# EAGLE board 2014_10_27_panel (EAGLE 6.5.0), part 1 of 2
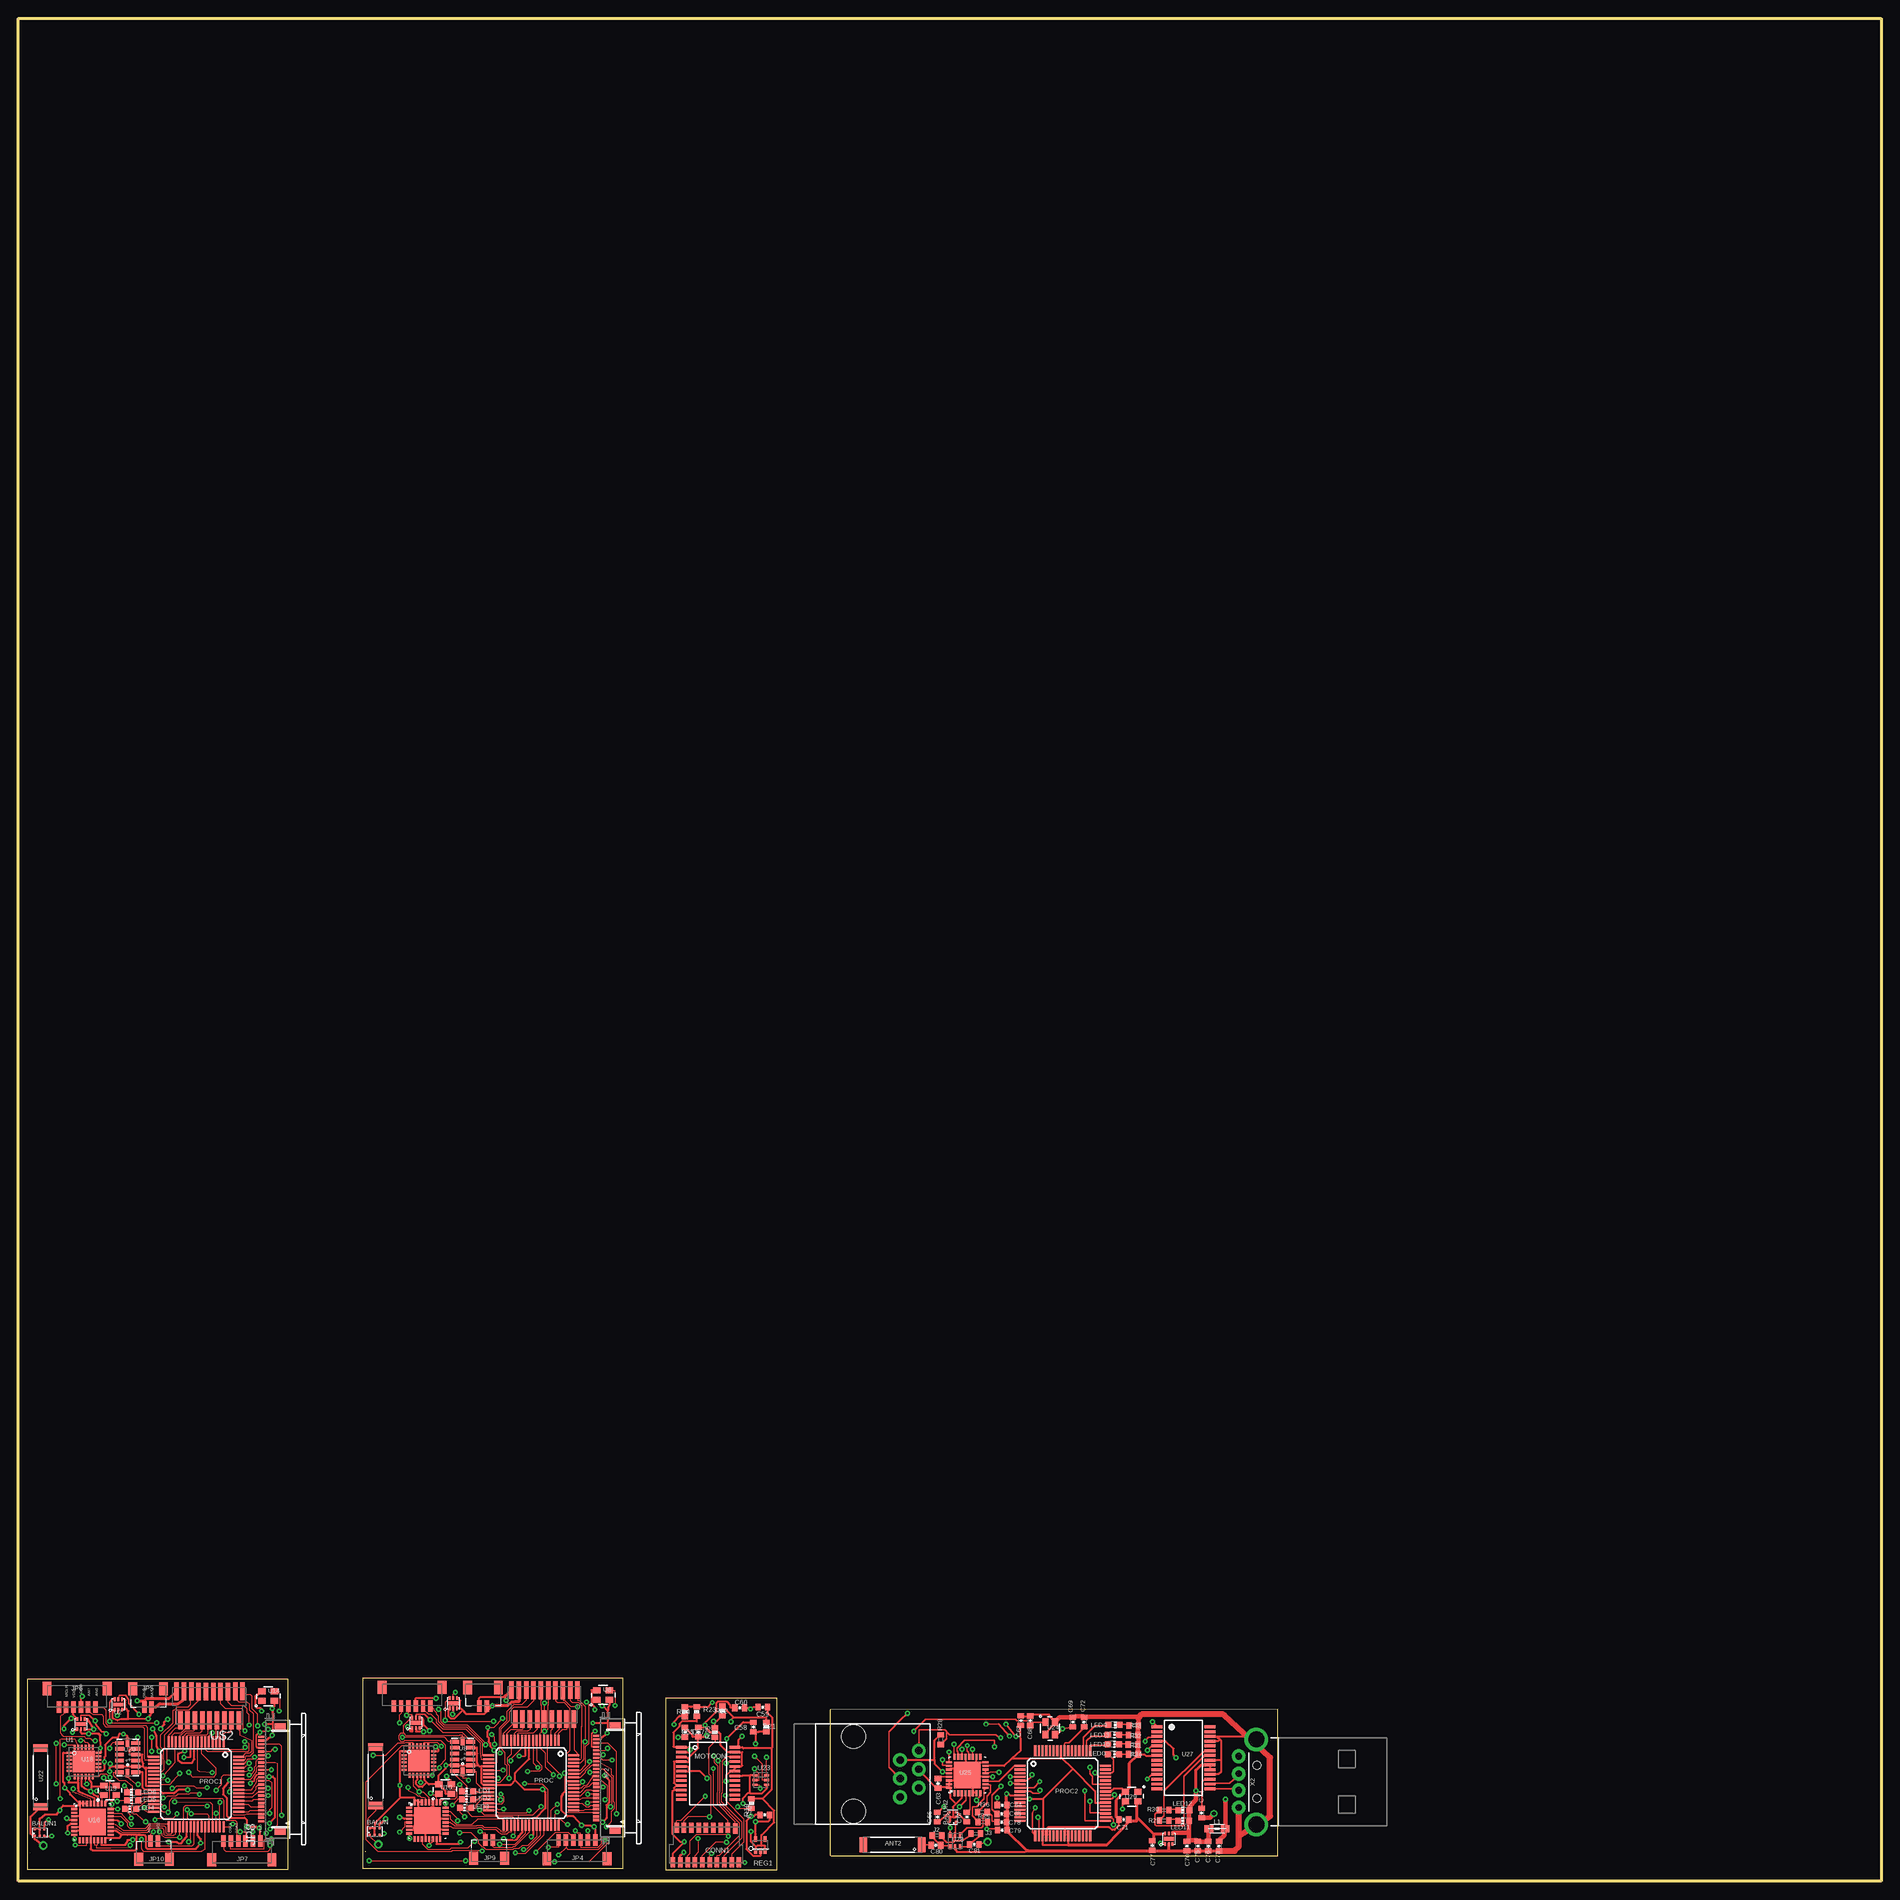
[diagram p0: board, top side]
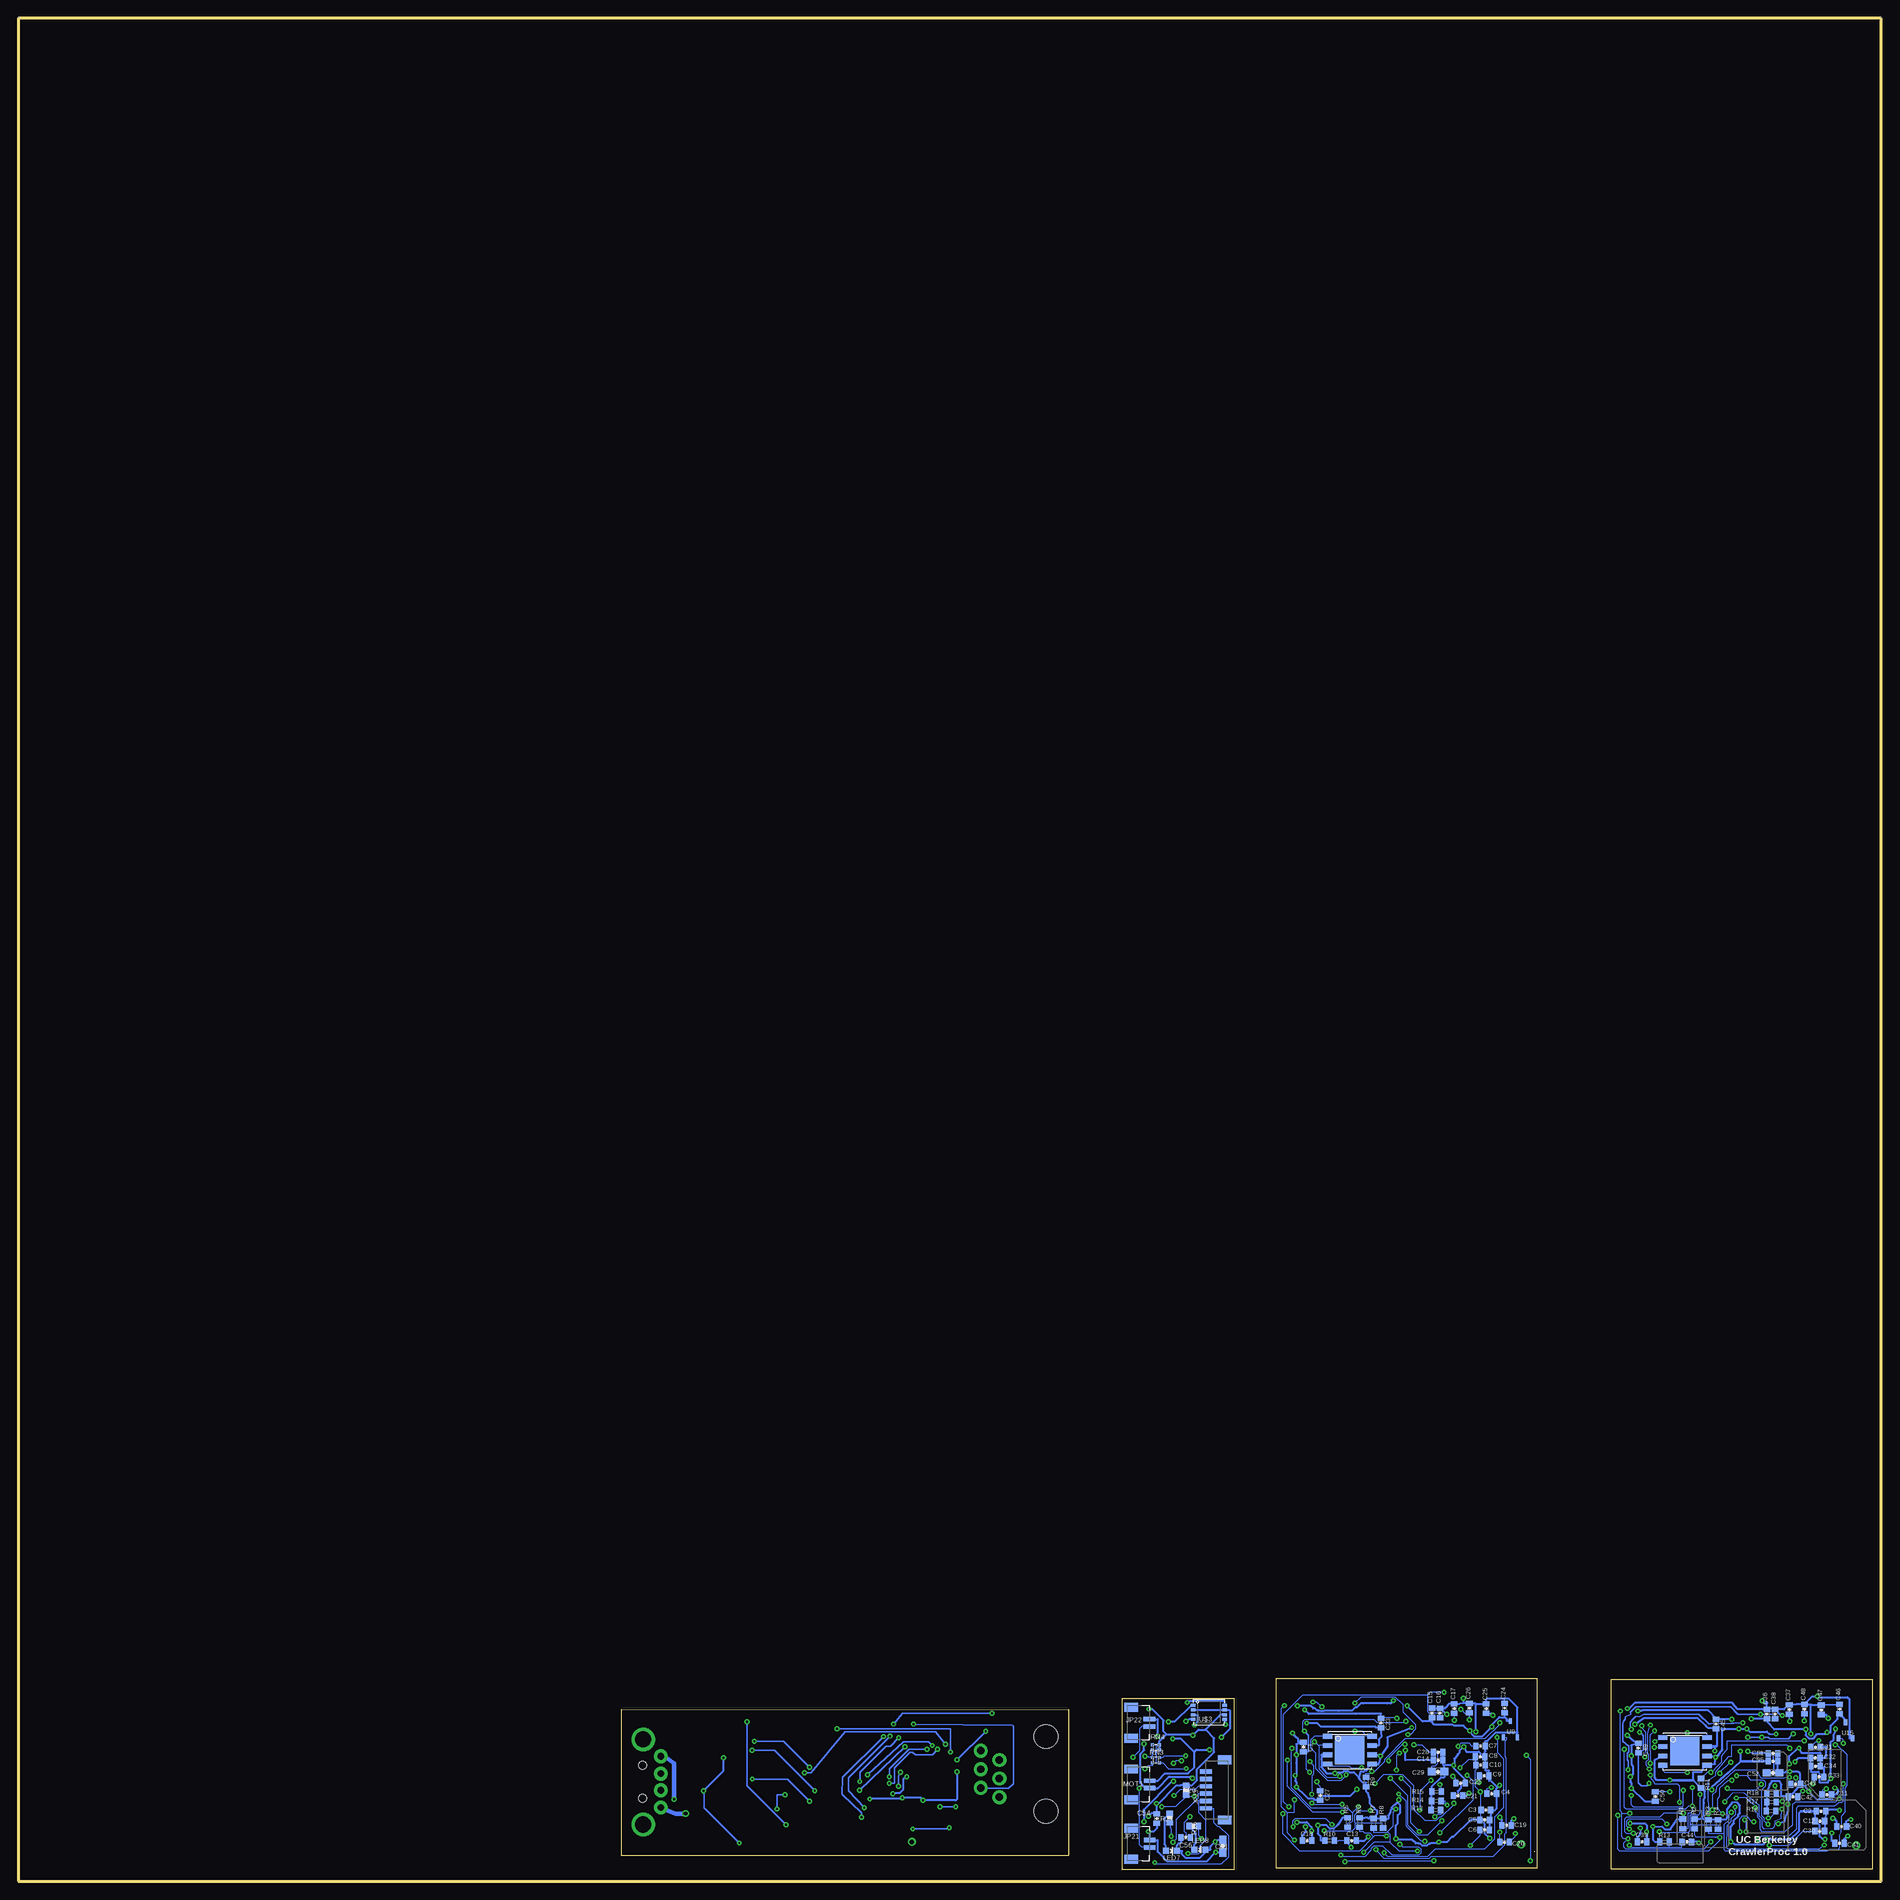
[diagram p1: board, bottom side, seen from below]

Size 254 x 254 mm. Coordinates in mm from the lower left corner, seen from the top.
Outline: 46.97,1.74 82.47,1.75 82.47,27.65 46.92,27.65 46.92,1.75
Outline: 47.28,4.05 47.27,4.05 47.27,4.04
Outline: 1.6,3.89 1.59,3.89 1.59,3.88
Outline: 110.81,3.47 171.76,3.43 171.76,23.43 110.77,23.4
Outline: 121.77,3.43 121.76,3.43
Outline: 110.76,3.43 110.76,23.43
Outline: 0,0 0,254 254,254 254,0 0,0
Outline: 1.24,1.59 36.79,1.59 36.79,27.49 1.24,27.49 1.24,1.59
Outline: 88.27,1.54 103.42,1.54 103.42,24.94 88.27,24.94 88.27,1.54
Copper layers (1*16): Top 0.035mm / dielectric 1.5mm / Bottom 0.035mm
Design rules "default *": minimum track width 5mil, minimum drill 10mil, track to track 5mil, track to pad 5mil, pad to pad 5mil, via to via 5mil, smd to smd 5mil, copper to edge 5mil, drill to drill 5mil, minimum pad ring 10mil, minimum via ring 8mil, stop-mask expansion 4mil, vias tented up to drill 27mil, thermal gap 10mil
Net classes: 1 sup: width 0.254 mm; 2 GND: width 0.305 mm, drill 0.254 mm, clearance 0.152 mm; 3 VCC: width 0.254 mm, drill 0.254 mm, clearance 0.152 mm

## Footprints (pad centres in the part's own frame; a part is rotated, then mirrored left to right if it is on the bottom)
ANTENNA_PAD = drill 0.6: P$1 0,0
ANTENNA-CHIP = smd 1 x 2: NC 4,0; SIG -4,0
BALUN = smd 0.27 x 0.4: 1 -0.7,-0.5; 2 -0.05,-0.5; 3 0.6,-0.5; 4 0.6,0.5; 5 -0.05,0.5; 6 -0.7,0.5
0402-CAP = smd 0.7 x 0.9: 1 -0.65,0; 2 0.65,0
0603-CAP = smd 1.1 x 1: 1 -0.85,0; 2 0.85,0
SAMTEC_19P_1MM_SOCKET = smd 0.61 x 1.375: 1 -4,-2.362; 2 -3.5,2.362; 3 -3,-2.362; 4 -2.5,2.362; 5 -2,-2.362; 6 -1.5,2.362; 7 -1,-2.362; 8 -0.5,2.362; 9 0,-2.362; 10 0.5,2.362; 11 1,-2.362; 12 1.5,2.362; 13 2,-2.362; 14 2.5,2.362; 15 3,-2.362; 16 3.5,2.362; 17 4,-2.362; 18 4.5,2.25; 19 5,-2.362
RJ11-6 = drill 1.016 pad 1.88: 1 1.905,8.89; 2 3.175,6.35; 3 4.445,8.89; 4 5.715,6.35; 5 6.985,8.89; 6 8.255,6.35 | hole 3.251: 0,0; 10.16,0
R0402 = smd 0.7 x 0.9: 1 -0.65,0; 2 0.65,0
MOLEX-PICO_CLASP_S2P = smd 0.6 x 1.6: 1 -0.5,1; 2 0.5,1 | smd 1.2 x 1.8: A -2.1,-1.5; B 2.1,-1.5
MOLEX-52740-2490 = smd 0.3 x 0.8: 1 -5.75,2.5; 2 -5.25,2.5; 3 -4.75,2.5; 4 -4.25,2.5; 5 -3.75,2.5; 6 -3.25,2.5; 7 -2.75,2.5; 8 -2.25,2.5; 9 -1.75,2.5; 10 -1.25,2.5; 11 -0.75,2.5; 12 -0.25,2.5; 13 0.25,2.5; 14 0.75,2.5; 15 1.25,2.5; 16 1.75,2.5; 17 2.25,2.5; 18 2.75,2.5; 19 3.25,2.5; 20 3.75,2.5; 21 4.25,2.5; 22 4.75,2.5; 23 5.25,2.5; 24 5.75,2.5 | smd 0.85 x 1.5: P$1 -7.18,-0.1; P$2 7.18,-0.1
MOLEX-PICO_CLASP_S6P = smd 0.6 x 1.6: 1 -2.5,1; 2 -1.5,1; 3 -0.5,1; 4 0.5,1; 5 1.5,1; 6 2.5,1 | smd 1.2 x 1.8: A -4.1,-1.55; B 4.1,-1.55
0805 = smd 1.2 x 1: 1 -1.1,0; 2 1.1,0
CHIP-LED0603 = smd 0.8 x 0.8: A 0,-0.75; C 0,0.75
LED-0603 = smd 0.8 x 0.8: A 0,-0.75; C 0,0.75
SSOP24 = smd 0.348 x 1.397: 1 -3.575,-3.656; 2 -2.925,-3.656; 3 -2.275,-3.656; 4 -1.625,-3.656; 5 -0.975,-3.656; 6 -0.325,-3.656; 7 0.325,-3.656; 8 0.975,-3.656; 9 1.625,-3.656; 10 2.275,-3.656; 11 2.925,-3.656; 12 3.575,-3.656; 13 3.575,3.656; 14 2.925,3.656; 15 2.275,3.656; 16 1.625,3.656; 17 0.975,3.656; 18 0.325,3.656; 19 -0.325,3.656; 20 -0.975,3.656; 21 -1.625,3.656; 22 -2.275,3.656; 23 -2.925,3.656; 24 -3.575,3.656
TQFP64 = smd 1.5 x 0.28: 1 -5.8,3.75; 2 -5.8,3.25; 3 -5.8,2.75; 4 -5.8,2.25; 5 -5.8,1.75; 6 -5.8,1.25; 7 -5.8,0.75; 8 -5.8,0.25; 9 -5.8,-0.25; 10 -5.8,-0.75; 11 -5.8,-1.25; 12 -5.8,-1.75; 13 -5.8,-2.25; 14 -5.8,-2.75; 15 -5.8,-3.25; 16 -5.8,-3.75; 33 5.8,-3.75; 34 5.8,-3.25; 35 5.8,-2.75; 36 5.8,-2.25; 37 5.8,-1.75; 38 5.8,-1.25; 39 5.8,-0.75; 40 5.8,-0.25; 41 5.8,0.25; 42 5.8,0.75; 43 5.8,1.25; 44 5.8,1.75; 45 5.8,2.25; 46 5.8,2.75; 47 5.8,3.25; 48 5.8,3.75 | smd 0.28 x 1.5: 17 -3.75,-5.8; 18 -3.25,-5.8; 19 -2.75,-5.8; 20 -2.25,-5.8; 21 -1.75,-5.8; 22 -1.25,-5.8; 23 -0.75,-5.8; 24 -0.25,-5.8; 25 0.25,-5.8; 26 0.75,-5.8; 27 1.25,-5.8; 28 1.75,-5.8; 29 2.25,-5.8; 30 2.75,-5.8; 31 3.25,-5.8; 32 3.75,-5.8; 49 3.75,5.8; 50 3.25,5.8; 51 2.75,5.8; 52 2.25,5.8; 53 1.75,5.8; 54 1.25,5.8; 55 0.75,5.8; 56 0.25,5.8; 57 -0.25,5.8; 58 -0.75,5.8; 59 -1.25,5.8; 60 -1.75,5.8; 61 -2.25,5.8; 62 -2.75,5.8; 63 -3.25,5.8; 64 -3.75,5.8
0402-RES = smd 0.7 x 0.9: 1 -0.65,0; 2 0.65,0
SC-70-5 = smd 0.4 x 0.75: 1 -0.65,-0.825; 2 0,-0.825; 3 0.65,-0.825; 4 0.65,0.825; 5 -0.65,0.825
EXB24V = smd 0.4 x 0.45: 1 -0.35,-0.475; 2 0.35,-0.475; 3 0.35,0.475; 4 -0.35,0.475
MLF-6 = smd 0.25 x 0.5: 1 -0.5,-0.7; 2 0,-0.7; 3 0.5,-0.7; 4 0.5,0.7; 5 0,0.7; 6 -0.5,0.7 | smd 1.4 x 0.5: P$1 0,0
QFN-24 = smd 0.7 x 0.275: 1 -2,1.25; 2 -2,0.75; 3 -2,0.25; 4 -2,-0.25; 5 -2,-0.75; 6 -2,-1.25; 13 2,-1.25; 14 2,-0.75; 15 2,-0.25; 16 2,0.25; 17 2,0.75; 18 2,1.25 | smd 0.275 x 0.7: 7 -1.25,-2; 8 -0.75,-2; 9 -0.25,-2; 10 0.25,-2; 11 0.75,-2; 12 1.25,-2; 19 1.25,2; 20 0.75,2; 21 0.25,2; 22 -0.25,2; 23 -0.75,2; 24 -1.25,2 | smd 2.95 x 2.95: 25 -0.01,0.03
QFN-32 = smd 0.8 x 0.3: 1 -2.5,1.75; 2 -2.5,1.25; 3 -2.5,0.75; 4 -2.5,0.25; 5 -2.5,-0.25; 6 -2.5,-0.75; 7 -2.5,-1.25; 8 -2.5,-1.75; 17 2.5,-1.75; 18 2.5,-1.25; 19 2.5,-0.75; 20 2.5,-0.25; 21 2.5,0.25; 22 2.5,0.75; 23 2.5,1.25; 24 2.5,1.75 | smd 0.3 x 0.8: 9 -1.75,-2.5; 10 -1.25,-2.5; 11 -0.75,-2.5; 12 -0.25,-2.5; 13 0.25,-2.5; 14 0.75,-2.5; 15 1.25,-2.5; 16 1.75,-2.5; 25 1.75,2.5; 26 1.25,2.5; 27 0.75,2.5; 28 0.25,2.5; 29 -0.25,2.5; 30 -0.75,2.5; 31 -1.25,2.5; 32 -1.75,2.5 | smd 3.6 x 3.6: P$1 0,0.001
MLF(VDFN)-8 = smd 1.27 x 0.635: 1 0,4.31; 2 0,3.04; 3 0,1.77; 4 0,0.5; 5 6.05,0.5; 6 6.05,1.77; 7 6.05,3.04; 8 6.05,4.31 | smd 4 x 3.9: P$1 2.991,2.44
OSCILLATOR-SMD = smd 1 x 0.8: 1 -0.85,-0.65; 2 0.85,-0.65; 3 0.85,0.65; 4 -0.85,0.65
LGA14 = smd 0.5 x 1.2: 1 2,1.1; 2 1.2,1.1; 3 0.4,1.1; 4 -0.4,1.1; 5 -1.2,1.1; 6 -2,1.1; 8 -2,-1.1; 9 -1.2,-1.1; 10 -0.4,-1.1; 11 0.4,-1.1; 12 1.2,-1.1; 13 2,-1.1 | smd 1.2 x 0.5: 7 -2.1,0; 14 2.1,0
SOT-23-3 = smd 0.45 x 0.8: 1 0.2,0.4; 2 1.15,2.6; 3 2.1,0.4
CRYSTAL-SMD = smd 1 x 0.8: 1 -0.85,-0.65; 2 0.85,-0.65; 3 0.85,0.65; 4 -0.85,0.65
SC-70-6 = smd 0.3 x 0.7: 1 -0.65,-0.8; 2 0,-0.8; 3 0.65,-0.8; 4 0.65,0.8; 5 0,0.8; 6 -0.65,0.8
SSOP28 = smd 0.4 x 1.5: 1 -4.225,-3.625; 2 -3.575,-3.625; 3 -2.925,-3.625; 4 -2.275,-3.625; 5 -1.625,-3.625; 6 -0.975,-3.625; 7 -0.325,-3.625; 8 0.325,-3.625; 9 0.975,-3.625; 10 1.625,-3.625; 11 2.275,-3.625; 12 2.925,-3.625; 13 3.575,-3.625; 14 4.225,-3.625; 15 4.225,3.625; 16 3.575,3.625; 17 2.925,3.625; 18 2.275,3.625; 19 1.625,3.625; 20 0.975,3.625; 21 0.325,3.625; 22 -0.325,3.625; 23 -0.975,3.625; 24 -1.625,3.625; 25 -2.275,3.625; 26 -2.925,3.625; 27 -3.575,3.625; 28 -4.225,3.625
SAMTEC_19P_1MM_MICRO_CONN = smd 0.61 x 2.44: 1 -4,-2; 2 -3.5,1.955; 3 -3,-2; 4 -2.5,1.955; 5 -2,-1.955; 6 -1.5,1.955; 7 -1,-1.955; 8 -0.5,1.955; 9 0,-1.955; 10 0.5,1.955; 11 1,-1.955; 12 1.5,1.955; 13 2,-1.955; 14 2.5,1.955; 15 3,-2; 16 3.5,1.955; 17 4,-2; 18 4.5,1.955; 19 5,-2
8-PIN_MSOP = smd 0.6 x 0.41: 1 -2.15,0.975; 2 -2.15,0.325; 3 -2.15,-0.325; 4 -2.15,-0.975; 5 2.15,-0.975; 6 2.15,-0.325; 7 2.15,0.325; 8 2.15,0.975
USB-A-H = drill 0.914 pad 1.88: D+ 2.4,1.127; D- 2.4,-1.127; GND 2.4,3.5; VBUS 2.4,-3.5 | drill 2.2: GND2 0,-5.8; GND3 0,5.8 | hole 1.1: -0.1,2.25; -0.1,-2.25

## Placement (x,y rotation side)
ANT1  ANTENNA  [ANTENNA_PAD]  132.17,5.35 0 top
ANT2  ANTENNA-CHIP  [ANTENNA-CHIP]  119.2,4.96 180 top
BALUN  HHM1710D1  [BALUN]  48.64,6.78 0 top
BALUN1  HHM1710D1  [BALUN]  2.96,6.62 0 top
BALUN2  HHM1710D1  [BALUN]  127.43,8.81 90 top
C1  0.1uF  [0402-CAP]  78.77,18.31 270 bottom
C2  1uF  [0402-CAP]  8.22,9.54 0 bottom
C3  1uF  [0402-CAP]  53.9,9.7 0 bottom
C4  1uF  [0402-CAP]  53.09,11.94 0 bottom
C5  1uF  [0402-CAP]  54.05,8.34 0 bottom
C6  1uF  [0402-CAP]  54.05,6.99 0 bottom
C7  2.2nF  [0402-CAP]  54.61,18.42 180 bottom
C8  0.1uF  [0402-CAP]  54.67,16.95 0 bottom
C9  0.1uF  [0402-CAP]  54.13,14.37 0 bottom
C10  10nF  [0402-CAP]  54.63,15.83 0 bottom
C11  1uF  [0402-CAP]  7.41,11.78 0 bottom
C12  1uF  [0402-CAP]  8.37,8.19 0 bottom
C13  0.1uF  [0402-CAP]  72.18,5.52 0 bottom
C14  0.1uF  [0402-CAP]  60.4,16.51 0 bottom
C15  1uF  [0402-CAP]  61.25,22.95 90 bottom
C16  1uF  [0402-CAP]  60.15,22.94 90 bottom
C17  1uF  [0402-CAP]  58.21,23.54 90 bottom
C18  0.1uF  [0402-CAP]  78.28,5.53 0 bottom
C19  22pF  [0402-CAP]  51.06,7.61 180 bottom
C20  22pF  [0402-CAP]  51.35,5.33 180 bottom
C21  12pF  [0402-CAP]  57.69,11.66 180 bottom
C22  12pF  [0402-CAP]  57.33,13.37 0 bottom
C23  0.1uF  [0402-CAP]  68.2,21.58 270 bottom
C24  1uF  [0402-CAP]  51.35,23.63 90 bottom
C25  1uF  [0402-CAP]  53.85,23.52 90 bottom
C26  1uF  [0402-CAP]  56.15,23.63 90 bottom
C27  2.2uF  [0402-CAP]  76.48,11.7 270 bottom
C28  0.1uF  [0402-CAP]  60.4,17.58 0 bottom
C29  10uF  [0603-CAP]  60.43,14.94 180 bottom
C30  1uF  [0402-CAP]  8.37,6.83 0 bottom
C31  2.2nF  [0402-CAP]  8.93,18.26 180 bottom
C32  0.1uF  [0402-CAP]  8.99,16.8 0 bottom
C33  0.1uF  [0402-CAP]  8.45,14.21 0 bottom
C34  10nF  [0402-CAP]  8.95,15.67 0 bottom
C35  0.1uF  [0402-CAP]  14.72,16.35 0 bottom
C36  1uF  [0402-CAP]  15.57,22.79 90 bottom
C37  1uF  [0402-CAP]  12.53,23.38 90 bottom
C38  1uF  [0402-CAP]  14.47,22.78 90 bottom
C39  0.1uF  [0402-CAP]  32.6,5.37 0 bottom
C40  22pF  [0402-CAP]  5.38,7.45 180 bottom
C41  22pF  [0402-CAP]  5.67,5.17 180 bottom
C42  12pF  [0402-CAP]  12.01,11.51 180 bottom
C43  12pF  [0402-CAP]  11.65,13.21 0 bottom
C44  0.1uF  [0402-CAP]  26.5,5.36 0 bottom
C45  0.1uF  [0402-CAP]  22.52,21.42 270 bottom
C46  1uF  [0402-CAP]  5.67,23.47 90 bottom
C47  1uF  [0402-CAP]  8.17,23.36 90 bottom
C48  1uF  [0402-CAP]  10.47,23.47 90 bottom
C49  0.1uF  [0402-CAP]  33.09,18.15 270 bottom
C50  2.2uF  [0402-CAP]  30.8,11.54 270 bottom
C51  0.1uF  [0402-CAP]  14.72,17.42 0 bottom
C52  10uF  [0603-CAP]  14.75,14.79 180 bottom
C53  1uF  [0402-CAP]  101.77,9.04 0 top
C54  2.2uF  [0402-CAP]  98.77,8.53 270 bottom
C55  0.01uF  [0402-CAP]  90.89,20.3 270 top
C56  1nF  [0402-CAP]  94.83,5.96 0 bottom
C57  0.1uF  [0402-CAP]  92.71,20.32 90 top
C58  0.1uF  [0402-CAP]  100.23,21.02 90 top
C59  0.1uF  [0402-CAP]  101.49,23.72 0 top
C60  0.1uF  [0402-CAP]  98.35,23.64 180 top
C61  10uF  [0603-CAP]  89.75,4.76 270 bottom
C62  1uF  [0402-CAP]  136.68,21.91 90 top
C63  1uF  [0402-CAP]  125.39,13.34 270 top
C64  1uF  [0402-CAP]  134.13,10.36 0 top
C65  1uF  [0402-CAP]  134.08,9.16 0 top
C66  22pF  [0402-CAP]  125.3,8.76 90 top
C67  22pF  [0402-CAP]  129.34,8.76 90 top
C68  12pF  [0402-CAP]  137.97,21.87 90 top
C69  12pF  [0402-CAP]  143.77,21.7 90 top
C70  1uF  [0402-CAP]  159.34,4.81 270 top
C71  1uF  [0402-CAP]  150.74,8.4 180 top
C72  2.2uF  [0402-CAP]  145.32,21.68 90 top
C73  10nF  [0402-CAP]  163.72,4.77 90 top
C74  0.1uF  [0402-CAP]  161.34,9.3 90 top
C75  0.1uF  [0402-CAP]  160.81,4.8 90 top
C76  4.7uF  [0402-CAP]  162.26,4.79 90 top
C77  0.1uF  [0402-CAP]  154.63,4.87 270 top
C78  22pF  [0402-CAP]  134.1,8.06 180 top
C79  22pF  [0402-CAP]  134.15,6.96 180 top
C80  22pF  [0402-CAP]  125.12,4.9 0 top
C81  22pF  [0402-CAP]  130.33,5 0 top
CONN1  SAMTEC_BKS_119_1  [SAMTEC_19P_1MM_SOCKET]  93.25,4.93 0 top
J1  RJ11-6PTH  [RJ11-6]  113.89,19.7 270 top
J2  0  [R0402]  125.26,6.25 180 top
J3  0  [R0402]  130.54,6.47 0 top
JP1  MPCS2PH  [MOLEX-PICO_CLASP_S2P]  63.36,24.89 180 top
JP2  51441-2493-C  [MOLEX-52740-2490]  81.29,14.08 90 top
JP3  ICD2  [MOLEX-PICO_CLASP_S6P]  53.7,24.88 180 top
JP4  WII  [MOLEX-PICO_CLASP_S6P]  76.16,4.62 0 top
JP5  MPCS2PH  [MOLEX-PICO_CLASP_S2P]  17.68,24.73 180 top
JP6  ICD2  [MOLEX-PICO_CLASP_S6P]  8.02,24.73 180 top
JP7  WII  [MOLEX-PICO_CLASP_S6P]  30.48,4.46 0 top
JP8  51441-2493-C  [MOLEX-52740-2490]  35.61,13.92 90 top
JP9  MPCS2PH  [MOLEX-PICO_CLASP_S2P]  64.2,4.62 0 top
JP10  MPCS2PH  [MOLEX-PICO_CLASP_S2P]  18.52,4.47 0 top
JP21  MPCS2PH  [MOLEX-PICO_CLASP_S2P]  100.75,5.1 270 bottom
JP22  MPCS2PH  [MOLEX-PICO_CLASP_S2P]  100.77,21.6 270 bottom
JP23  MPCS6PH  [MOLEX-PICO_CLASP_S6P]  91.07,12.44 90 bottom
L1  Ferrite Bead  [0805]  163.45,7.14 180 top
LED0  Red  [CHIP-LED0603]  149.32,17.3 270 top
LED1  Red  [CHIP-LED0603]  61.26,12.28 90 top
LED2  Green  [CHIP-LED0603]  61.27,11.18 90 top
LED3  Yellow  [CHIP-LED0603]  61.01,10.02 90 top
LED4  Yellow  [CHIP-LED0603]  15.33,9.86 90 top
LED5  Green  [CHIP-LED0603]  15.59,11.02 90 top
LED6  Red  [CHIP-LED0603]  15.58,12.12 90 top
LED7  Green  [LED-0603]  96.79,4.14 270 bottom
LED8  Red  [LED-0603]  92.89,4.3 270 bottom
LED9  Blue  [CHIP-LED0603]  149.4,21.3 270 top
LED10  Green  [CHIP-LED0603]  149.3,18.66 270 top
LED11  Green  [CHIP-LED0603]  158.9,8.24 90 top
LED12  Orange  [CHIP-LED0603]  158.92,9.69 90 top
LED13  Yellow  [CHIP-LED0603]  149.32,19.94 270 top
MOT1  MPCS2PH  [MOLEX-PICO_CLASP_S2P]  100.75,13.19 270 bottom
MOTCON  TB6621FNG  [SSOP24]  94.05,14.68 270 top
PROC  DSPIC33FJ128MC706A  [TQFP64]  69.92,13.39 270 top
PROC1  DSPIC33FJ128MC706A  [TQFP64]  24.24,13.23 270 top
PROC2  DSPIC33  [TQFP64]  142.41,11.97 0 top
R1  4.7k  [R0402]  27.05,7.82 90 bottom
R2  4.7k  [R0402]  25.44,7.82 90 bottom
R3  4.7k  [R0402]  23.53,7.73 90 bottom
R4  4.7k  [R0402]  22.23,7.73 90 bottom
R5  4.7k  [R0402]  72.73,7.97 90 bottom
R6  4.7k  [R0402]  71.12,7.97 90 bottom
R7  4.7k  [R0402]  69.21,7.89 90 bottom
R8  4.7k  [R0402]  67.91,7.89 90 bottom
R9  10k  [R0402]  70.24,13.51 270 bottom
R10  27k  [R0402]  75.2,5.53 180 bottom
R11  10k  [R0402]  24.56,13.35 270 bottom
R12  470  [R0402]  60.72,9.71 180 bottom
R13  27k  [R0402]  29.52,5.37 180 bottom
R14  470  [R0402]  60.65,10.94 180 bottom
R15  470  [R0402]  60.64,12.2 180 bottom
R16  470  [R0402]  15.04,9.55 180 bottom
R17  470  [R0402]  14.97,10.78 180 bottom
R18  470  [R0402]  14.96,12.04 180 bottom
R19  100K  [0402-RES]  99.96,10.59 270 top
R20  100K  [0402-RES]  94.76,12.4 90 bottom
R21  15K  [0402-RES]  101.99,21.03 90 top
R22  12K  [0402-RES]  95.99,23.22 270 top
R23  15K  [0402-RES]  92.49,23.11 90 top
R24  12K  [0402-RES]  90.88,23.1 270 top
R25  1K  [0402-RES]  94.98,20.28 270 top
R26  470  [0402-RES]  93.75,7.5 0 bottom
R27  470  [0402-RES]  96.99,8.62 270 bottom
R28  10k  [R0402]  125.77,19.29 90 top
R29  470  [R0402]  156.26,8.28 0 top
R30  470  [R0402]  156.22,9.68 0 top
R31  470  [R0402]  151.99,18.63 180 top
R32  470  [R0402]  152.01,19.93 180 top
R33  470  [R0402]  152.1,21.24 180 top
R34  470  [R0402]  152.04,17.3 180 top
R35  2K  [R0402]  131.49,8.06 0 top
R36  2K  [R0402]  131.46,9.44 0 top
REG1  ZXCL330H5TA  [SC-70-5]  101.18,4.94 0 top
RN3  1K  [EXB24V]  98.89,16.51 90 bottom
RN4  100K  [EXB24V]  98.9,18.24 90 bottom
U1  MIC5335-SPYMT  [MLF-6]  54.21,21.58 0 top
U2  MIC5320-JGYML  [MLF-6]  59.3,24.26 0 top
U3  ITG-3200  [QFN-24]  54.6,16.43 0 top
U4  AT86RF231-ZU  [QFN-32]  55.78,8.25 0 top
U5  AT45DB321D  [MLF(VDFN)-8]  75.45,15.45 0 bottom
U6  ECS-2033  [OSCILLATOR-SMD]  79.75,25.38 0 top
U7  AT45DB321D  [MLF(VDFN)-8]  29.77,15.3 0 bottom
U8  ADXL345-LGA12  [LGA14]  60.57,17 270 top
U9  MN13822-L  [SOT-23-3]  51.71,19.23 0 bottom
U10  ECS-160-8  [CRYSTAL-SMD]  58.19,12.56 0 top
U11  ANTENNA  [ANTENNA_PAD]  49.09,5.01 0 top
U12  ANTENNA-CHIP  [ANTENNA-CHIP]  48.72,14.3 90 top
U13  ECS-160-8  [CRYSTAL-SMD]  12.51,12.4 0 top
U14  ECS-2033  [OSCILLATOR-SMD]  34.07,25.22 0 top
U15  MN13822-L  [SOT-23-3]  6.03,19.07 0 bottom
U16  AT86RF231-ZU  [QFN-32]  10.1,8.09 0 top
U17  MIC5320-JGYML  [MLF-6]  13.62,24.1 0 top
U18  ITG-3200  [QFN-24]  8.92,16.27 0 top
U19  MIC5335-SPYMT  [MLF-6]  8.53,21.42 0 top
U20  ADXL345-LGA12  [LGA14]  14.89,16.85 270 top
U21  ANTENNA  [ANTENNA_PAD]  3.41,4.85 0 top
U22  ANTENNA-CHIP  [ANTENNA-CHIP]  3.04,14.14 90 top
U23  SI1988DHA  [SC-70-6]  101.24,13.78 270 top
U24  ECX-2236  [CRYSTAL-SMD]  140.68,20.84 270 top
U25  AT86RF231-ZU  [QFN-32]  129.4,14.47 90 top
U26  MIC5335-SPYMT  [MLF-6]  156.87,5.78 0 top
U27  FT232RL  [SSOP28]  158.86,16.82 270 top
U28  AS183-92  [SC-70-6]  127.73,5.49 0 top
U29  ECS-2033  [OSCILLATOR-SMD]  151.81,11.52 180 top
U$1  SAMTEC_BKT_119_1  [SAMTEC_19P_1MM_MICRO_CONN]  72.25,24.06 180 top
U$2  SAMTEC_BKT_119_1  [SAMTEC_19P_1MM_MICRO_CONN]  26.57,23.9 180 top
U$3  LTC1992  [8-PIN_MSOP]  91.64,23.03 0 bottom
X2  USB-A-H  [USB-A-H]  168.8,13.53 180 top

## Library data of the parts
ANT1 ANT2 BALUN BALUN1 BALUN2 JP1-JP10 JP21-JP23 MOT1 PROC PROC1 PROC2 REG1 U1-U26 U28 U29 = stan
C1-C81 J1 LED7 LED8 MOTCON R19-R27 X2 = SparkFun
CONN1 U$1-U$3 = AMH
J2 J3 R1-R18 R28-R36 = rcl
L1 = wuerth-elektronik
LED0 LED1-LED6 LED9-LED13 = led
RN3 RN4 = resistor-dil
U27 = ftdichip; MPN: FT232RL; OC_FARNELL: 1146032; OC_NEWARK: 91K9918

## Nets
AN0: PROC.16 U$1.18
AN1: PROC.15 U$1.16
AN2: PROC1.24 U$2.13
AN3: PROC.13 U$1.14
AN4: PROC.12 U$1.12
AN5: PROC.11 U$1.10
AN6: PROC1.15 U$2.16
AN7: PROC1.16 U$2.18
AN8: PROC.21 U$1.15
AN9: PROC.22
AN10: JP9.1 PROC.23
AN11: PROC.24 U$1.13
AN12: PROC1.13 U$2.14
AN13: PROC1.12 U$2.12
AN14: PROC1.11 U$2.10
AN15: JP10.1 PROC1.23
AN16: PROC1.21 U$2.15
AN17: PROC1.22
AN18 [sup]: C56.2 CONN1.4 R25.2
AN19 [sup]: CONN1.8
AN20 [sup]: CONN1.10
AN21 [sup]: CONN1.6
AN22 [sup]: CONN1.5 R27.2
AN23 [sup]: CONN1.7 R26.2
AN24 [sup]: CONN1.2 R19.2 R20.1
BAT+ [sup]: C15.1 C24.1 JP1.1 U1.1 U1.3 U1.4 U2.1 U2.3 U2.4 U9.2 U$1.17
BAT+1 [sup]: C36.1 C46.1 JP5.1 U15.2 U17.1 U17.3 U17.4 U19.1 U19.3 U19.4 U$2.17
GND [sup]: BALUN.2 BALUN.5 BALUN.6 C1.1 C3.2 C4.2 C5.2 C6.2 C7.1 C8.2 C9.2 C10.2 C13.2 C14.2 C15.2 C16.2 C17.2 C18.2 C21.2 C22.2 C23.2 C24.2 C25.2 C26.2 C27.2 C28.2 C29.1 JP1.2 JP2.10 JP2.19 JP2.23 JP3.3 JP4.5 PROC.9 PROC.20 PROC.25 PROC.41 R12.2 R14.2 R15.2 U1.2 U2.2 U3.1 U3.9 U3.11 U3.18 U4.3 U4.6 U4.7 U4.12 U4.16 U4.18 U4.21 U4.27 U4.30 U4.31 U4.32 U4.P$1 U5.7 U6.2 U8.2 U8.4 U8.5 U8.12 U9.3 U10.2 U10.4 U$1.19
GND1 [sup]: BALUN1.2 BALUN1.5 BALUN1.6 C2.2 C11.2 C12.2 C30.2 C31.1 C32.2 C33.2 C34.2 C35.2 C36.2 C37.2 C38.2 C39.2 C42.2 C43.2 C44.2 C45.2 C46.2 C47.2 C48.2 C49.1 C50.2 C51.2 C52.1 JP5.2 JP6.3 JP7.5 JP8.10 JP8.19 JP8.23 PROC1.9 PROC1.20 PROC1.25 PROC1.41 R16.2 R17.2 R18.2 U7.7 U13.2 U13.4 U14.2 U15.3 U16.3 U16.6 U16.7 U16.12 U16.16 U16.18 U16.21 U16.27 U16.30 U16.31 U16.32 U16.P$1 U17.2 U18.1 U18.9 U18.11 U18.18 U19.2 U20.2 U20.4 U20.5 U20.12 U$2.19
GND2 [GND]: C53.1 C54.1 C55.1 C56.1 C57.1 C59.1 C60.1 C61.1 CONN1.1 LED7.C LED8.C MOTCON.3 MOTCON.4 MOTCON.9 MOTCON.10 MOTCON.18 R20.2 REG1.2 RN4.1 RN4.2 U23.1 U23.4 U$3.6
GND3 [sup]: BALUN2.2 BALUN2.5 BALUN2.6 C62.2 C63.2 C64.2 C65.2 C68.2 C69.2 C70.2 C71.2 C72.2 C73.1 C74.1 C75.1 C76.1 C77.2 C78.1 C79.1 J1.3 PROC2.9 PROC2.20 PROC2.25 PROC2.41 R31.1 R32.1 R33.1 R34.1 U24.2 U24.4 U25.3 U25.6 U25.7 U25.12 U25.16 U25.18 U25.21 U25.27 U25.30 U25.31 U25.32 U25.P$1 U26.2 U27.7 U27.18 U27.21 U27.25 U27.26 U28.2 U29.2 X2.GND
INT1: PROC.42 U3.12
INT2: PROC.43 U9.1
INT3: PROC.44 U8.8
INT4: PROC.45 U4.24
INT5: PROC1.42 U18.12
INT6: PROC1.43 U15.1
INT7: PROC1.44 U20.8
INT8: PROC1.45 U16.24
INT9: PROC2.45 U25.24
MCLR: JP3.5 PROC.7 R9.1
MCLR1: JP6.5 PROC1.7 R11.1
MCLR2: J1.1 PROC2.7 R28.1
N$1: C27.1 PROC.56
N$2: C11.1 U16.29
N$3: LED3.C R12.1
N$4: C30.1 U16.13 U16.14
N$5: C31.2 U18.20
N$6: LED3.A PROC.29
N$7: LED2.C R14.1
N$8: LED1.C R15.1
N$9: LED2.A PROC.28
N$10: C33.1 U18.10
N$11: LED1.A PROC.27
N$12: PROC1.8 U7.4
N$13: BALUN1.4 C40.1
N$14: BALUN1.3 C41.1
N$15: C40.2 U16.4
N$16: C41.2 U16.5
N$17: BALUN1.1 U21.P$1 U22.SIG
N$18: C43.1 U13.3 U16.25
N$19: C42.1 U13.1 U16.26
N$20: C44.1 JP7.1 R13.1
N$21: JP3.1 PROC.17
N$22: PROC1.6 U7.1
N$23: C4.1 U4.29
N$24: JP3.2 PROC.18
N$25: LED4.C R16.1
N$26: LED4.A PROC1.29
N$27: JP6.1 PROC1.17
N$28: C6.1 U4.13 U4.14
N$29: C7.2 U3.20
N$30: JP6.2 PROC1.18
N$31: LED5.C R17.1
N$32: C9.1 U3.10
N$33: LED6.C R18.1
N$34: LED5.A PROC1.28
N$35: LED6.A PROC1.27
N$36: C50.1 PROC1.56
N$37 [sup]: JP22.2 U23.6
N$38 [sup]: JP21.2 U23.3
N$39 [sup]: RN3.3 RN4.4 U23.5
N$40: R21.2 R22.1 U$3.1
N$41: R23.2 R24.1 U$3.8
N$42: PROC1.4 U7.2
N$43: BALUN.4 C19.1
N$44: R24.2 U$3.5
N$45: PROC1.5 U7.8
N$46: BALUN.3 C20.1
N$47: C19.2 U4.4
N$48: PROC.8 U5.4
N$49: C20.2 U4.5
N$50: C22.1 U4.25 U10.3
N$51: C21.1 U4.26 U10.1
N$52: BALUN.1 U11.P$1 U12.SIG
N$53: C55.2 U$3.2 U$3.7
N$54: R22.2 R25.1 U$3.4
N$55 [sup]: RN3.4 RN4.3 U23.2
N$56: LED7.A R27.1
N$57: C13.1 JP4.1 R10.1
N$58: LED8.A R26.1
N$59: C63.1 U25.29
N$60: C65.1 U25.13 U25.14
N$61: BALUN2.4 C66.1
N$62: BALUN2.3 C67.1
N$63: C66.2 U25.4
N$64: C67.2 U25.5
N$65: C69.1 U24.3 U25.25
N$66: C68.1 U24.1 U25.26
N$67: C72.1 PROC2.56
N$68: C73.2 L1.1 X2.VBUS
N$69: U27.16 X2.D-
N$70: U27.15 X2.D+
N$71: C74.2 U27.17
N$72: R36.1 U25.10
N$73: R35.1 U25.9
N$74: C81.1 J3.2 U28.3
N$75: C80.2 J2.2 U28.1
N$76: LED10.A PROC2.49
N$77: LED9.A PROC2.51
N$78: LED10.C R31.2
N$79: LED13.A PROC2.50
N$80: LED13.C R32.2
N$81: LED9.C R33.2
N$82: LED0.A PROC2.46
N$83: LED0.C R34.2
N$84: J1.5 PROC2.17
N$85: J1.4 PROC2.18
N$86: R29.1 U27.23
N$87: R30.1 U27.22
N$88: LED11.C R29.2
N$89: LED12.C R30.2
N$90: C78.2 R36.2 U28.4
N$91: C79.2 R35.2 U28.6
N$92: BALUN2.1 J2.1 J3.1 U28.5
N$93: ANT2.SIG C80.1
N$94: ANT1.P$1 C81.2
OSC1: JP2.12 JP4.2 PROC.39 U6.3
OSC2: JP9.2 PROC.40
OSC3: JP7.2 JP8.12 PROC1.39 U14.3
OSC4: JP10.2 PROC1.40
OSC5: PROC2.39 U29.3
PWM1H: PROC.61 U$1.7
PWM1H1: PROC1.61 U$2.7
PWM1H2 [sup]: CONN1.13 MOTCON.21
PWM1L: PROC.60 U$1.5
PWM1L1: PROC1.60 U$2.5
PWM1L2 [sup]: CONN1.15 MOTCON.22
PWM2H: PROC.63 U$1.3
PWM2H1: PROC1.63 U$2.3
PWM2H2 [sup]: CONN1.17 JP23.4
PWM2L: PROC1.62 U$2.1
PWM3H: PROC.1 U$1.4
PWM3H1: PROC1.1 U$2.4
PWM3H2 [sup]: CONN1.16 RN3.1
PWM3L: PROC.64 U$1.2
PWM3L1: PROC1.64 U$2.2
PWM3L2 [sup]: CONN1.18 RN3.2
PWM4H: PROC.3 U$1.8
PWM4H1: PROC1.3 U$2.8
PWM4H2 [sup]: CONN1.12
PWM4L: PROC.2 U$1.6
PWM4L1: PROC1.2 U$2.6
PWM4L2 [sup]: CONN1.14
RB1: PROC1.30 U16.11
RB15: PROC.30 U4.11
RC1: JP8.18 PROC1.47
RC2: JP8.17 PROC1.48
RC13: JP2.18 PROC.47
RC14: JP2.17 PROC.48
RD0: JP2.6 PROC.46
RD1: JP2.4 PROC.49
RD2: JP2.3 PROC.50
RD3: JP2.5 PROC.51
RD4: JP2.7 PROC.52
RD5: JP2.9 PROC.53
RD6: JP2.11 PROC.54
RD7: JP2.13 PROC.55
RD8: JP8.3 PROC1.50
RD9: JP8.5 PROC1.51
RD10: JP8.6 PROC1.46
RD11: JP8.7 PROC1.52
RD12: JP8.9 PROC1.53
RD13: JP8.11 PROC1.54
RD14: JP8.13 PROC1.55
RD15: JP8.4 PROC1.49
RE5: PROC2.1 U25.11
RF0: JP2.16 PROC.58
RF1: JP2.8 PROC.59
RF2: JP8.8 PROC1.59
RF3: JP8.16 PROC1.58
SCK1: PROC.35 U4.19
SCK2: PROC.4 PROC.62 U5.2 U$1.1
SCK3: PROC1.35 U16.19
SCK4 [sup]: CONN1.19 JP23.1
SCK5: PROC2.4 U25.19
SCL1: JP2.20 PROC.37 R5.1 U8.14
SCL2: JP4.4 PROC.32 R8.1 U3.23
SCL3: JP8.20 PROC1.37 R1.1 U20.14
SCL4: JP7.4 PROC1.32 R4.1 U18.23
SDA1: JP2.22 PROC.36 R6.1 U8.13
SDA2: JP4.3 PROC.31 R7.1 U3.24
SDA3: JP8.22 PROC1.36 R2.1 U20.13
SDA4: JP7.3 PROC1.31 R3.1 U18.24
SDI1: PROC.34 U4.20
SDI2: PROC.5 U5.8 U$1.9
SDI3: PROC1.34 U16.20
SDI4 [sup]: CONN1.11 JP23.2
SDI5: PROC2.5 U25.20
SDO1: PROC.33 U4.22
SDO2: PROC.6 U5.1 U$1.11
SDO3: PROC1.33 U16.22
SDO4 [sup]: CONN1.9 JP23.3
SDO5: PROC2.6 U25.22
SS1: PROC.14 U4.23
SS2: PROC1.14 U16.23
SS3: PROC2.8 U25.23
U1CTS: PROC2.43 U27.3
U1RTS: PROC2.35 U27.11
U1RX: PROC2.34 U27.1
U1TX: PROC2.33 U27.5
VBAT: C54.2 C59.2 C61.2 CONN1.3 JP21.1 JP22.1 MOTCON.24 R19.1 REG1.1 REG1.3
VCC: C1.2 C17.1 JP2.14 JP2.21 U2.6
VCC1: C37.1 C49.2 JP8.14 JP8.21 U17.6
VCC2 [VCC]: C53.2 C57.2 C60.2 MOTCON.19 MOTCON.20 MOTCON.23 REG1.5 U$3.3
VDD: C3.1 C5.1 C8.1 C10.1 C14.1 C18.1 C23.1 C25.1 JP3.4 JP4.6 PROC.10 PROC.19 PROC.26 PROC.38 PROC.57 R5.2 R6.2 R7.2 R8.2 R9.2 R10.2 U1.6 U3.8 U3.13 U4.8 U4.15 U4.28 U5.3 U5.5 U5.6 U6.4 U8.1 U8.7
VDD1: C2.1 C12.1 C32.1 C34.1 C35.1 C39.1 C45.1 C47.1 JP6.4 JP7.6 PROC1.10 PROC1.19 PROC1.26 PROC1.38 PROC1.57 R1.2 R2.2 R3.2 R4.2 R11.2 R13.2 U7.3 U7.5 U7.6 U14.4 U16.8 U16.15 U16.28 U18.8 U18.13 U19.6 U20.1 U20.7
VDD2: C62.1 C64.1 C71.1 C77.1 J1.2 PROC2.10 PROC2.19 PROC2.26 PROC2.38 PROC2.57 R28.2 U25.8 U25.15 U25.28 U26.6 U29.4
VEE: C16.1 JP2.15 U2.5
VEE1: C38.1 JP8.15 U17.5
VM1+: C58.1 MOT1.2 MOTCON.5 MOTCON.6 R21.1
VM1-: C58.2 MOT1.1 MOTCON.1 MOTCON.2 R23.1
VPP: C26.1 C28.1 C29.2 U1.5 U8.6
VPP1: C48.1 C51.1 C52.2 U19.5 U20.6
VPP2: C70.1 C75.2 C76.2 L1.2 LED11.A LED12.A U26.1 U26.4 U27.4 U27.19 U27.20

## Tracks (layer width: path | path; a pad name or v marks a point on that pad's centre or on a via)
AN0
  Top 0.127: U$1.18 67.75,21.72 66.17,20.13 PROC.16
AN1
  Top 0.127: U$1.16 68.75,20.69 67.22,20.69 66.67,20.13 PROC.15
AN2  (via drill 0.25)
  Top 0.127: PROC1.24 19.08,13.48 19.09,13.49 19.19,13.49 19.49,13.19 20.69,13.19 v21.99,14.69 | v20.49,16.19 20.49,16.29 20.29,16.49 20.29,17.89 19.99,18.19 19.99,19.99 21.49,21.49 21.49,23.19 21.69,23.39 23.29,23.39 24.59,24.69 24.59,25.84 U$2.13
  Bottom 0.127: v21.99,14.69 21.99,14.89 v20.49,16.19
AN3
  Top 0.127: PROC.13 67.67,20.13 67.94,20.41 69.47,20.41 69.75,20.69 U$1.14
AN4
  Top 0.127: PROC.12 68.17,20.13 70.19,20.13 70.75,20.69 U$1.12
AN5  (via drill 0.25 pad 0.66)
  Top 0.127: v67.17,16.41 67.17,16.7 68.67,18.2 PROC.11 | v64.92,18.65 64.92,19.61 v64.54,19.99 | U$1.10 v71.75,24.29
  Bottom 0.127: v64.92,18.65 65.28,18.65 67.17,16.77 v67.17,16.41 | v71.75,24.29 70.89,25.15 66.28,25.15 65.21,24.09 65.21,23.12 63.49,21.39 63.49,20.72 64.22,19.99 v64.54,19.99
AN6
  Top 0.127: PROC1.15 20.99,19.89 21.32,20.26 22.18,20.26 22.95,20.99 22.99,21.86 U$2.16
AN7
  Top 0.127: PROC1.16 20.49,19.89 21.49,20.89 21.89,20.89 21.89,21.76 U$2.18
AN8  (via drill 0.25 pad 0.66)
  Top 0.127: v66.11,15.14 65.06,15.14 PROC.21 | v65.71,17.48 65.58,17.61 65.58,20.87 66.59,21.89 66.59,23.11 67.51,24.02 68.63,24.02 69.25,24.65 U$1.15
  Bottom 0.127: v65.71,17.48 66.11,17.07 v66.11,15.14
AN10  (via drill 0.25 pad 0.66)
  Top 0.127: JP9.1 63.7,6.62 63.1,6.62 v62.94,6.77 | PROC.23 65.32,14.14 v65.45,14.01
  Bottom 0.127: v65.45,14.01 64.23,12.79 64.23,8.06 v62.94,6.77
AN11
  Top 0.127: PROC.24 65.06,13.64 65.21,13.49 65.67,13.49 66.23,14.06 66.23,14.09 66.64,14.49 66.64,15.72 66.39,15.96 66.39,17.54 65.83,18.1 65.83,20.77 66.98,21.91 66.98,23.12 67.62,23.77 69.42,23.77 70.25,24.6 U$1.13
AN12
  Top 0.127: PROC1.13 21.99,19.79 22.08,19.93 22.21,19.93 22.84,20.51 23.89,20.51 24.09,20.69 24.09,21.93 U$2.14
AN13
  Top 0.127: PROC1.12 22.55,19.79 22.96,20.25 24.8,20.25 25.09,20.49 25.09,21.93 U$2.12
AN14
  Top 0.127: PROC1.11 22.99,19.79 23.19,19.98 25.69,19.98 25.89,20.19 25.89,21.76 U$2.10
AN15  (via drill 0.25 pad 0.66)
  Top 0.127: PROC1.23 19.23,14 19.45,13.8 v20.37,13.75 | v21.63,9.17 21.4,8.84 21.15,8.59 18.88,8.59 v18.63,8.36 | JP10.1 18.03,5.9 18.03,5.98 18.04,6.13 18.04,6.4 v18.42,6.74
  Bottom 0.127: v20.37,13.75 20.84,13.76 21.99,12.72 22,11.62 22.29,11.26 22.29,9.86 v21.63,9.17 | v18.42,6.74 18.42,8.02 18.43,8.23 v18.63,8.36
AN16
  Top 0.127: PROC1.21 19.59,14.98 19.86,15.25 19.85,17.82 19.43,18.28 19.43,19.93 21.09,21.59 21.09,23.29 21.19,23.39 21.29,23.39 21.69,23.79 23.19,23.79 23.49,24.09 23.49,25.81 U$2.15
AN18  (via drill 0.25 pad 0.66)
  Top 0.152: CONN1.4 90.75,8.21 91.35,8.8 v94.23,8.8 94.47,9.05 94.47,14.27 94.2,14.54 94.2,18.27 94.98,19.05 R25.2
  Bottom 0.152: C56.2 94.76,5.96 94.76,6.54 94.98,6.76 94.98,8.05 v94.23,8.8
AN22  (via drill 0.25 pad 0.66)
  Top 0.152: v96.81,6.11 96.55,6.38 92.45,6.38 91.57,5.5 91.57,3.8 91.25,3.48 CONN1.5
  Bottom 0.152: R27.2 96.99,7.39 96.81,7.22 v96.81,6.11
AN23  (via drill 0.25 pad 0.66)
  Top 0.152: CONN1.7 92.25,3.48 92.68,3.91 v92.68,5.82
  Bottom 0.152: R26.2 93.1,6.23 v92.68,5.82
AN24  (via drill 0.25 pad 0.66)
  Top 0.152: CONN1.2 89.75,8.21 90.28,8.21 v93.67,11.6 | v98.09,10.13 98.28,9.94 99.28,9.94 R19.2
  Bottom 0.152: 94.76,11.6 96.23,10.13 v98.09,10.13 | 94.76,11.6 94.76,11.61 R20.1 | 94.76,11.6 v93.67,11.6
BAT+  (via drill 0.25 pad 0.66)
  Top 0.254: 60.55,23.27 60.26,23.56 | U2.1 58.64,23.39 58.64,22.52 58.98,22.18 59.47,22.18 60.55,23.27 | 60.55,23.27 60.99,22.83 63.58,22.83 v64.64,23.89 64.45,23.89 64.45,23.93 | v56.09,20.49 55.36,21.22 55.17,21.22 | 55.17,21.22 54.83,20.88 U1.3 | U1.4 54.96,22.25 55.17,21.91 55.17,21.22 | 53.41,20.56 53.58,20.38 53.71,20.38 U1.1 | 53.41,20.56 | 53.41,20.56 53.09,20.87 v53.09,21.04 | 60.26,23.56 U2.3 | 60.26,23.56 60.26,24.62 59.92,24.96 U2.4
  Top 0.406: JP1.1 64.45,23.89 | 64.45,23.93 64.5,23.97 66.77,23.97 67.25,24.45 67.59,24.45 67.67,24.51 68.25,24.51 U$1.17
  Bottom 0.254: 61.25,21.79 62.53,21.79 v64.64,23.89 | 61.25,21.79 61.25,21.7 60.9,21.35 58.43,21.35 58.29,21.21 56.94,21.21 56.16,20.43 | C15.1 61.25,21.79 | 56.16,20.43 55.51,19.78 54.35,19.78 v53.09,21.04 53.09,21.34 52.06,22.37 51.35,22.37 | 56.16,20.43 v56.09,20.49 | U9.2 51.03,21.83 51.03,22.06 51.35,22.37 | C24.1 51.35,22.37
BAT+1  (via drill 0.25)
  Top 0.254: JP5.1 18.19,22.89 18,22.6 17.79,22.35 v17.69,22.14 14.99,22.09 | U17.1 12.89,23.07 12.89,22.19 13.49,21.93 13.99,22.09 14.99,22.09 | U17.4 14.48,24.8 14.59,24.69 14.59,23.59 14.78,23.4 | 14.78,23.4 U17.3 | 14.78,23.4 14.99,23.19 14.99,22.09 | U19.4 9.09,22.15 9.49,22.09 10.36,20.72 | U19.3 10.36,20.72 | 10.36,20.72 v10.29,20.69 | U19.1 7.92,20.72 v7.39,20.29
  Top 0.406: JP5.1 18.77,23.77 19.29,24.19 21.79,24.19 22.49,24.69 22.49,25.81 U$2.17
  Bottom 0.254: U15.2 4.88,21.97 5.26,22.39 5.36,22.42 C46.1 5.96,22.72 5.99,22.09 6.89,21.19 6.89,20.29 v7.39,20.29 7.39,20.09 8.69,20.09 9.19,19.49 9.89,19.49 10.29,19.89 v10.29,20.69 14.59,20.69 15.49,21.66 C36.1 15.54,22.14 v17.69,22.14
GND  (via drill 0.25 pad 0.66)
  Top 0.254: 66.25,25.09 63.01,25.09 62.86,24.95 JP1.2 | v66.5,24.63 66.5,24.85 66.25,25.09 | 66.25,25.09 66.25,25.12 | 80.34,21.55 80.33,21.56 v78.33,21.56 | v56.97,24.94 54.2,24.94 JP3.3 | v79.9,14.41 80.58,13.75 80.58,10.76 80.19,10.37 80.19,8.59 v79.68,8.05 | 80.39,23.57 80.35,23.25 79.72,23.89 v79.61,23.89 | U2.2 59.3,23.01 59.18,22.76 v59.22,22.76 | 55.78,8.41 57.53,8.41 57.63,8.5 U4.21 | 55.47,9.27 55.47,8.71 55.78,8.41 | 55.78,8.41 U4.P$1 55.53,8 55.53,7 | 57.53,6.99 55.53,6.99 | U4.18 57.54,7 57.53,6.99 | 57.53,6.99 57.53,6.4 U4.16 | 55.53,6.99 55.53,7 | 55.53,6.99 55.53,6.34 U4.12 | U4.27 56.53,10.09 56.3,10.09 55.47,9.27 | 55.47,9.27 54.53,9.27 | U4.30 U4.31 | 54.03,11.03 54.25,11.03 U4.31 | 55.7,13.48 55.35,13.82 U3.11 | 55.7,13.48 55.97,13.2 U10.4 | 55.7,13.48 55.08,12.86 54.59,12.86 54.25,13.21 54.25,13.71 54.35,13.82 U3.9 | 54.53,9.27 54.21,9.27 53.94,9 U4.3 | 54.53,9.27 54.53,10.09 U4.31 | 54.03,11.03 54.03,11.4 52.16,11.4 52.14,11.43 | U4.32 54.03,11.03 | 53.7,7 53.94,7.24 53.94,7.5 U4.6 | 53.7,7 53.61,7 U4.7 | 53.7,7 53.94,7 55.53,7 | 52.14,11.43 52.04,11.52 v52.04,13.05 52,13.09 52,17.68 U3.1 | 52.14,11.43 48.59,7.88 BALUN.5 | BALUN.5 48.33,7.28 BALUN.6 | 67.76,13.74 67.76,14.75 69.67,16.66 PROC.9 | 67.76,13.74 68.97,12.53 v71.47,12.53 71.86,12.14 71.86,9.93 70.52,8.6 70.17,8.6 PROC.41 70.17,6.28 v69.94,6.06 | 67.76,13.74 67.16,13.14 PROC.25 63.36,13.14 63.11,13.39 63.11,15.64 | U10.4 58.28,12.26 58.28,11.91 U10.2 | U10.4 57.34,14.42 58.29,15.37 v58.29,15.8 58.62,15.8 U8.12 U8.2 62.52,15.8 62.52,15.82 62.73,15.82 | U3.18 57.21,17.68 57.21,17.98 v56.88,18.31 | v55.27,20.37 54.44,20.37 54.44,20.38 54.21,20.38 U1.2
  Top 0.254: U6.2 80.6,24.08 80.39,23.57 | 80.34,21.55 80.34,20.25 80.31,20.23 80.27,20.05 v80.27,20.2 79.44,19.55 79.44,19.33 JP2.23 | U8.5 62.52,18.2 62.52,17.41 | U8.4 62.52,17.41 | PROC.20 63.11,15.64 | 62.73,15.82 62.91,15.64 63.11,15.64 | JP2.19 79.44,17.33 79.44,17.31 79.6,17.31 v79.75,17.24 | v79.74,12.83 79.65,12.83 JP2.10 | v77.66,6.88 JP4.5 | 62.73,15.82 62.59,16.09 62.59,17.41 62.52,17.41 | 80.39,23.57 80.34,22.96 80.34,21.55 | BALUN.2 BALUN.5
  Top 0.406: U$1.19 66.25,25.12
  Bottom 0.254: 69.19,21.07 68.9,21.07 68.9,20.93 C23.2 68.2,20.32 68.14,19.71 68.52,19.34 68.52,18.49 U5.7 | 69.19,21.07 | 69.19,21.07 69.31,21.07 76.39,21.07 76.88,21.56 v78.33,21.56 | v66.5,24.63 66.88,24.25 67.38,24.25 70.63,24.25 70.64,24.24 70.97,24.24 71.51,23.7 71.71,23.7 72.17,23.24 73.96,23.24 73.99,23.2 76,23.2 76.02,23.18 76.51,23.18 76.52,23.2 76.7,23.2 76.77,23.27 76.91,23.27 77.2,23.56 77.45,23.56 77.82,23.94 79.51,23.94 v79.61,23.89 | 56.91,24.26 57.51,24.2 57.51,24.19 C17.2 58.92,24.19 59.45,23.66 59.45,23.59 59.8,23.59 C16.2 | 56.86,24.26 56.86,24.27 C26.2 55.45,24.27 55.35,24.17 55.27,24.17 | 56.86,24.26 | 56.86,24.26 56.91,24.26 | 56.91,24.26 v56.97,24.94 | 49.61,20.28 52.52,20.28 53.68,19.12 53.96,19.12 C7.1 53.96,17.71 54.02,17.66 C8.2 | v79.68,8.05 78.33,8.05 77.66,7.38 v77.66,6.88 77.63,6.85 C18.2 | C15.2 60.55,23.6 60.53,23.59 C16.2 | C21.2 57.73,11.66 57.73,12.27 57.29,12.72 57.29,13.37 C22.2 56.68,13.8 58.29,15.41 v58.29,15.8 | v58.29,15.8 U8.12 59.58,15.7 | 49.61,20.28 49.61,23.7 50.79,24.88 51.35,24.88 | 51.35,24.88 53.75,24.88 53.85,24.78 C25.2 55.27,24.17 | C8.2 54.02,16.57 53.98,16.54 C10.2 53.98,15.13 53.92,15.07 53.48,15.07 C9.2 53.48,14.02 53.48,13.67 53.21,13.67 52.32,12.77 | 52.32,12.77 52.32,12.76 52.44,12.64 C4.2 52.44,9.9 52.65,9.7 C3.2 53.25,9 U4.3 53.31,8.3 C5.2 53.4,7.64 C6.2 | v52.04,13.05 52.32,12.77 | C24.2 51.35,24.88 | v71.47,12.53 72.34,11.65 76.48,11.65 C27.2 77.18,11.05 77.38,11.24 78.09,11.24 78.12,11.27 | U9.3 49.61,20.28 | v58.29,15.8 58.22,15.88 58.22,16.69 57.76,17.15 57.76,17.19 57.73,17.22 57.73,17.3 57.51,17.52 57.51,17.75 v56.88,18.31 56.56,17.67 54.88,17.67 54.62,17.42 54.62,16.95 C8.2
  Bottom 0.254: v69.94,6.06 70.49,5.51 70.93,5.52 C13.2 | 59.58,15.7 C29.1 59.58,14.19 60,14.19 61.29,12.91 R15.2 61.29,11.66 61.3,11.64 R14.2 61.3,10.23 61.28,10.23 61.27,9.83 61.17,9.82 R12.2 | 78.12,11.27 | 78.12,11.27 78.48,11.63 v79.74,12.83 79.74,13.52 79.9,13.68 v79.9,14.41 79.75,14.53 79.74,16.1 | v55.27,20.37 55.27,24.17 | C16.2 59.37,22.8 v59.22,22.76 | 79.48,18.96 79.48,19.36 80.27,20.05 v80.27,20.2 | C28.2 59.75,16.87 C14.2 59.75,15.81 59.69,15.81 59.58,15.7 | C1.1 79.48,18.96 | 79.48,18.96 79.48,18.76 79.75,18.68 v79.75,17.24 79.74,16.1 | 79.74,16.1
GND1  (via drill 0.25, 0.25 pad 0.66)
  Top 0.254: BALUN1.2 BALUN1.5 | BALUN1.5 BALUN1.6 | v34.63,23.53 34.62,23.42 34.66,23.02 34.71,23.41 | 34.71,23.41 34.66,22.8 34.66,21.39 | 34.66,21.39 34.66,20.19 | 34.66,20.19 34.66,19.91 33.72,19.17 JP8.23 | 16.17,6.32 16.17,4.41 16.02,4.22 10.09,4.22 10.12,4.23 9.85,4.37 9.85,5.42 | 16.17,6.32 16.59,6.32 16.3,6.32 17.14,6.32 17.16,6.3 17.4,6.08 17.39,4.57 17.64,4.41 24.19,4.41 v24.88,5.2 24.88,5.73 24.49,6.22 PROC1.41 | U18.1 6.15,17.53 6.14,13.47 6.3,13.34 v6.3,12.71 7.05,11.96 | PROC1.25 17.4,12.98 17.4,15.22 17.14,15.48 | v34.22,14.25 34.69,14.25 34.97,13.98 34.97,8.66 v34.23,7.89 | 14.88,6.32 14.08,6.32 13.72,5.87 12.95,5.88 11.87,5.88 U16.16 | 7.05,11.96 | U16.31 8.29,10.59 7.05,11.82 7.05,11.96 | v9.86,12.24 9.92,12.3 10.01,12.4 10,12.91 | v9.86,12.24 8.96,12.67 8.67,12.95 U18.9 | U16.32 U16.31 | v34.07,17.08 33.9,17.16 33.64,17.17 JP8.19 | U16.32 8.35,10.34 | U16.32 | 17.05,15.66 17.05,16.01 16.91,16.28 16.91,17.26 U20.4 15.19,17.25 15.19,18.05 U20.5 | 17.05,15.66 17.05,15.57 17.14,15.48 | U18.18 11.2,17.51 v11.2,18.15 11.19,19.89 11.02,20.06 10.89,20.06 v9.59,20.09 8.69,20.09 8.53,20.35 U19.2 | U16.31 9.25,10.59 U16.30 | 17.05,15.66 16.5,15.66 16.04,15.7 U20.2 U20.12 13.8,15.67 12.61,15.67 v12.54,16.01 12.54,15.47 12.46,15.47 v12.46,14.94 | 10,12.91 10.52,12.91 11.27,12.92 U13.4 | 14.88,6.32 14,6.32 13.29,6.84 13.27,6.84 U16.18 | v9.86,12.24 10.26,11.8 10.85,11.6 U16.27 | v12.75,10.47 12.74,10.92 12.9,11.14 U13.2 | 10,12.91 10,13.4 10,13.41 9.68,13.88 U18.11 | 9.85,5.42 U16.12 | v31.98,6.72 JP7.5 | 17.14,15.48 17.39,15.48 PROC1.20 | v34.06,12.67 33.97,12.67 JP8.10 | v14.03,7.8 13.56,8.24 U16.21
  Top 0.254: 16.17,6.32 15.79,6.32 15.4,6.32 14.88,6.32 | v22.66,17.73 21.85,17.38 21.76,17.36 21.76,16.56 22.3,16.16 23.73,16.16 23.99,16.68 PROC1.9 | U16.31 8.86,10.76 8.85,10.76 U16.31 | 34.66,20.19 v34.59,19.89 | U16.P$1 10.09,8.09 8.99,9.19 | 8.99,9.19 8.39,9.79 8.39,10.55 U16.32 | U16.3 8.64,8.84 8.99,9.19 | U16.7 9.14,6.84 9.19,6.89 9.19,7.18 9.35,7.34 | 9.35,7.34 U16.6 | U16.P$1 9.35,7.34 | 9.85,5.42 9.85,7.84 U16.P$1 | U14.2 34.92,23.93 34.71,23.41 | v33.59,21.4 34.65,21.4 34.66,21.39 | U17.2 13.62,22.86 v13.49,22.59 | JP6.3 8.52,25.02 v8.69,25.19 | U16.32 8.05,10.29 6.09,10.29 5.68,9.88 v5.68,9.66 5.25,9.09 3.69,9.09 2.91,8.51 BALUN1.5
  Top 0.406: 17.18,24.58 JP5.2 | 17.18,24.58 17.5,24.96 20.57,24.96 U$2.19 | v16.19,24.59 17.29,24.59 17.18,24.58
  Bottom 0.254: 7.72,8.23 7.75,8.23 | 7.72,8.23 C12.2 7.63,8.15 C2.2 7.01,9.74 5.95,9.74 v5.68,9.66 | 13.6,11.61 13.61,13.2 13.84,13.65 14.95,13.65 15.21,13.23 R18.2 15.61,10.87 R17.2 15.59,9.67 15.49,9.67 R16.2 | 13.6,11.61 13.11,11.6 C42.2 12.66,11.12 v12.75,10.47 12.75,9.48 13.06,8.79 13.24,8.11 v14.03,7.8 | 15.79,23.54 16.2,23.42 | 16.2,23.42 19.57,23.43 20.29,24.29 33.59,24.29 34.25,23.63 34.44,23.53 v34.63,23.53 | U15.3 4.33,19.47 4.33,24.84 4.59,25.09 8.59,25.09 v8.69,25.19 9.4,25.19 C48.2 | C50.2 32.19,10.89 v34.06,12.67 34.06,13.36 34.22,13.52 v34.22,14.25 33.87,14.54 33.86,15.64 33.91,15.71 34.07,15.93 v34.07,17.08 34.07,18.52 C49.1 33.39,18.8 33.72,19.13 v34.59,19.89 | C43.2 11.12,13.15 11.04,13.23 11.04,14.69 11.38,14.94 v12.46,14.94 12.99,14.94 13.15,14.79 C52.1 14.03,14.79 14.07,14.83 C35.2 14.07,17.23 14.02,17.26 C51.2 | C32.2 8.34,17.51 10.88,17.51 v11.2,18.15 11.34,18.1 12.54,17.03 v12.54,16.01 | 7.72,8.23 C30.2 | C43.2 10.33,12.96 9.93,12.4 9.73,12.37 9.69,12.37 v9.86,12.24 8.96,11.34 | 32.24,7.89 31.98,7.63 v31.98,6.72 31.95,6.7 | 32.24,7.89 | v34.23,7.89 32.24,7.89 | C43.2 12.4,11.57 13.6,11.61 | 8.96,11.34 8.7,11.08 6.76,11.08 C11.2 6.24,11.78 5.88,12.04 5.88,12.37 6.11,12.7 v6.3,12.71 | 8.96,11.34 | C33.2 7.8,15.55 C34.2 8.31,15.57 8.34,15.6 C32.2 | v33.59,21.4 32.33,22.27 25.09,22.27 23.9,21.2 23.56,20.91 22.89,20.92 C45.2 22.44,20.63 22.41,20.27 22.41,18.75 | 22.41,18.75 22.43,18.36 23.75,18.36 U7.7 22.65,18.36 22.66,17.93 v22.66,17.73 | 22.41,18.75 | C32.2 7.74,16.8 7.48,17.06 7.48,18.26 C31.1 | 31.95,6.7 | 31.95,6.7 C39.2 | C48.2 11.59,24.1 11.89,24.07 C37.2 12.69,23.99 13.25,23.43 C38.2
  Bottom 0.254: v24.88,5.2 25.11,5.35 C44.2 | 15.57,24.27 C36.2 15.79,23.54 | 15.79,23.54 14.59,23.44 C38.2 | 15.79,23.54 15.87,23.44 16.2,23.42 | v13.49,22.59 13.69,22.65 C38.2 | 9.36,24.01 C47.2 | 9.36,24.01 C46.2 | 9.49,24.01 9.36,24.01 | 9.49,24.01 10.37,24.01 C48.2 | v9.59,20.09 9.59,23.91 9.49,24.01
  Bottom 0.406: 15.57,24.27 v16.19,24.59
GND2  (via drill 0.25 pad 0.66)
  Top 0.305: 99.78,12.02 99.79,12.02 101.44,12.02 102.04,12.61 U23.4 | C57.1 91.95,19.67 91.95,19.88 C55.1 | 91.29,16.73 92.71,18.15 C57.1 | 89.73,13.05 89.39,12.71 89.39,12.41 | 89.73,13.05 89.94,13.05 MOTCON.9 | 89.73,13.05 89.39,13.4 89.39,16.3 MOTCON.4 90.9,16.3 91.4,16.3 91.4,16.62 91.29,16.73 | 89.39,12.41 89.14,12.16 89.14,6.47 90.26,5.36 v90.81,5.36 89.25,3.8 89.25,3.56 CONN1.1 | 91.29,16.73 91.06,16.95 90.84,16.95 MOTCON.3 | MOTCON.10 89.39,12.41 | 99.84,23.55 100.02,23.55 100.19,23.72 C59.1 | 99.84,23.55 99.74,23.55 99.66,23.64 C60.1 | 99.84,23.55 v99.84,23.46 | C57.1 93.46,19.67 93.69,19.9 v93.84,19.9 | REG1.2 101.18,3.44 100.2,3.44 99.28,4.36 99.28,8.22 v99.9,8.84 100.27,8.84 100.46,9.04 C53.1 | 99.78,14.36 99.78,14.43 U23.1 | 99.78,12.02 99.78,14.36 | 99.78,14.36 98.71,14.36 MOTCON.18 | v98.82,10.59 98.82,11.33 99.51,12.02 99.78,12.02
  Bottom 0.305: 97.47,20.05 93.99,20.05 v93.84,19.9 93.08,20.65 92.08,20.65 | 97.47,20.05 98.42,19.09 RN4.2 RN4.1 | 97.47,20.05 97.83,20.42 97.83,21.91 99.38,23.46 v99.84,23.46 | 92.08,20.65 90.95,19.51 90.95,17.59 93.28,15.26 93.28,13.77 94,13.05 R20.2 95.52,13.05 96.08,13.05 98.68,10.45 | 91.79,4.3 92.95,3.14 94.81,3.14 95.33,3.67 95.33,4.14 LED7.C 96.04,4.85 95.68,5.21 95.48,5.21 C56.1 | 91.79,4.3 91.44,4.3 91.44,4.73 v90.81,5.36 90.55,5.61 C61.1 | LED8.C 91.79,4.3 | 92.08,20.65 92.08,20.71 90.09,22.7 U$3.6 | 98.77,9.26 99.48,9.26 v99.9,8.84 | 98.77,9.26 98.77,9.84 98.77,10.36 98.68,10.45 | C54.1 98.77,9.26 | v98.82,10.59 98.68,10.45
GND3  (via drill 0.25, 0.51)
  Top 0.254: 162.3,4.14 C76.1 162.12,4.14 | 163.54,4.14 C73.1 | C75.1 160.88,4.14 | C70.2 | U29.2 150.92,12.24 | 150.03,8.41 C71.2 150.01,8.23 150.01,7.52 149.48,6.99 149.12,6.99 148.77,7.34 142.72,7.34 | 152.7,18.72 R31.1 | R32.1 152.7,19.79 | 152.52,17.12 152.52,17.3 R34.1 152.85,17.3 153.57,17.3 153.74,17.12 155.17,17.12 U27.7 | 151.1,12.32 U29.2 | PROC2.41 149,12.22 149.41,12.63 150.5,12.63 U29.2 | 137.97,22.71 C68.2 | 141.14,21.32 141.24,21.58 U24.4 | 140.07,20.15 U24.2 | C68.2 137.84,22.45 | 136.77,22.45 C62.2 136.85,22.4 | 144.16,22.45 C69.2 | 145.23,22.45 C72.2 145.41,22.43 | 152.66,21.15 R33.1 152.7,21.39 | 152.7,22.43 152.7,22.23 152.67,22.23 | 142.72,7.34 140.41,7.34 140.23,7.16 140.23,6.28 PROC2.20 | 142.72,7.34 142.72,6.28 PROC2.25 | C68.2 137.74,22.4 | 134.89,9.07 C65.2 134.89,9.25 | 134.89,8.18 C78.1 134.89,8 | 134.89,10.31 C64.2 | 127.07,8.71 127.07,8.18 BALUN2.6 | 127.42,8.71 127.07,8.71 | 127.42,8.71 127.78,8.71 BALUN2.2 | 127.07,8.71 BALUN2.5 | 126.89,12.8 126.89,13.16 U25.31 126.89,13.34 126.89,13.69 U25.30 127.07,13.69 127.6,13.69 127.6,15.29 | 127.42,8.71 127.42,10.14 127.87,10.58 | 127.87,10.58 128.67,11.38 128.67,11.91 U25.3 | 126.89,12.8 125.47,12.8 C63.2 | 126.89,12.8 U25.32 127.07,12.63 127.07,11.38 127.87,10.58 | J1.3 122.8,15.11 125.29,12.63 C63.2 | 134.89,6.76 134.89,7.11 C79.1 134.71,6.76 | 154.55,4.14 C77.2 | U28.2 127.78,4.62 | C63.2 125.11,12.63 | v132.85,14.22 U25.12 131.87,14.23 130.09,14.23 | v134.76,11.93 135.01,11.93 135.21,11.73 PROC2.9 | U25.7 130.62,12.09 130.27,12.09 U25.6 130.09,12.09 130.09,14.23 | 129.2,15.29 129.38,15.29 129.38,15.11 | 129.2,15.29 127.6,15.29 | 127.6,15.29 127.07,15.29 U25.27
  Top 0.254: 129.38,15.11 129.38,14.58 U25.P$1 | 129.2,15.29 129.2,16.89 U25.21 | U25.P$1 129.2,15.29 | 129.38,15.11 130.62,16.36 130.62,16.89 U25.18 | U25.P$1 129.38,15.11 | U25.16 131.87,16.18 130.62,16.18 U25.P$1 | 130.09,14.23 130.09,15.29 U25.P$1 | U25.P$1 127.6,15.29 | 130.09,14.23 U25.P$1 | 162.5,19.71 U27.26
  Top 0.305: C77.2 154.69,4.16 | 141.14,21.32 140.07,20.15 | 137.74,22.4 136.85,22.4 | 137.97,22.71 140.56,22.71 U24.4 | 127.78,4.62 127.78,4.27 127.96,3.99 137.2,3.99 137.71,4.14 | 163.43,19.71 167.46,19.71 170.68,16.89 | 163.43,19.71 162.5,19.71 | 163.43,19.71 163.81,19.33 | 163.81,19.33 163.96,19.18 163.96,16.53 | 163.96,16.53 163.96,14.88 163.66,14.58 162.52,14.58 U27.18 | U27.21 163.93,16.5 163.96,16.53 | U27.25 163.58,19.09 163.81,19.33
  Top 0.406: 162.3,4.14 163.54,4.14 | 160.88,4.14 162.12,4.14 | C70.2 C75.1 | 156.86,4.16 C70.2 | U26.2 156.87,4.17 156.86,4.16 | 154.69,4.16 156.86,4.16 | 150.92,12.24 149.68,11 149.68,8.76 150.03,8.41 | 151.1,12.32 151.45,12.68 151.45,16.05 152.52,17.12 | R31.1 152.69,18.58 | 134.89,8.18 134.89,9.07 | 134.89,9.25 134.89,10.31 | 134.89,7.11 134.89,8 | 134.89,6.76 137.51,4.14 137.71,4.14 154.55,4.14 | v132.86,14.23 v132.85,14.22 | v134.76,11.93 134.76,10.38 C64.2
  Top 0.61: 152.7,19.79 152.7,18.72 | 145.23,22.45 144.16,22.45 | 152.66,21.15 R32.1 | 152.69,18.58 R34.1 | 152.7,22.43 145.41,22.43 | 152.7,22.23 152.7,21.39 | C69.2 141.99,22.35 U24.4 | C74.1 162.46,8.65 v163.03,9.22 | 164.44,22.63 164.31,22.74
  Top 0.813: 152.67,22.23 153.16,22.74 164.31,22.74 | 166.4,6.21 166.4,4.71 165.83,4.14 163.74,4.14 C73.1 | 166.4,6.21 X2.GND | 164.44,22.63 170.68,16.89 170.68,8.86 166.4,6.21
  Bottom 0.254: 133.01,14.23 133.31,13.93 133.31,12.53 133.81,12.03 134.66,12.03
  Bottom 0.406: 133.01,14.23 v132.86,14.23 | v134.76,11.93 134.66,12.03
  Bottom 0.61: v163.03,9.22 164.39,9.22 X2.GND
INT1  (via drill 0.25 pad 0.66)
  Top 0.127: PROC.42 70.67,6.04 69.46,4.85 68.69,4.85 68.25,4.41 67.56,4.41 67.43,4.27 63.8,4.27 63.44,4.63 63.31,4.63 62.76,5.18 62.76,5.6 61.77,6.59 v60.16,6.59 | U3.12 v56.45,14.43
  Bottom 0.127: v56.45,14.43 55.7,13.68 55.7,11.05 v60.16,6.59
INT2  (via drill 0.25 pad 0.66)
  Top 0.127: PROC.43 71.17,6.19 69.3,4.32 v68.91,4.32
  Bottom 0.127: v68.91,4.32 68.91,4.29 67.71,3.08 61.68,3.08 61.42,3.34 52.92,3.34 51.35,4.91 51.35,6.38 51.17,6.56 51.17,16.84 51.34,17.01 51.34,19.08 51.2,19.23 51.17,19.23 51.09,19.31 51.09,19.63 U9.1
INT3  (via drill 0.25 pad 0.66)
  Top 0.127: U8.8 58.68,19 58.1,19.59 52.39,19.59 v52.36,19.62 | v67.77,3.88 67.86,3.8 69.14,3.8 71.67,6.33 PROC.44
  Bottom 0.127: v52.36,19.62 52.36,17.56 51.51,16.71 51.51,10 52.77,8.74 52.77,5.7 54.12,4.35 60.88,4.35 61.89,3.34 67.23,3.34 v67.77,3.88
INT4  (via drill 0.25 pad 0.66)
  Top 0.127: v69.02,13.3 71.43,13.3 72.18,12.55 72.18,8.55 72.17,8.53 PROC.45 | v58.28,10.62 U4.24
  Bottom 0.127: v69.02,13.3 67.78,14.55 65.25,14.55 63.76,13.05 63.76,9.8 62.23,8.28 60.66,8.28 60.17,8.77 59.93,8.77 58.28,10.42 v58.28,10.62
INT5  (via drill 0.25 pad 0.66)
  Top 0.127: v23.01,9.76 23.01,8.64 23.27,8.38 24.99,8.38 PROC1.42 | v12.49,14.15 12.18,14.45 11.95,14.61 11.24,14.61 11,14.27 U18.12
  Bottom 0.127: v12.49,14.15 13.05,14.13 13.18,14.03 16.34,14.02 16.95,15.1 17.58,15.1 19.95,15.11 20.83,14.28 22.51,12.77 22.52,12.16 23.02,11.77 v23.01,9.76
INT6  (via drill 0.25, 0.25 pad 0.66)
  Top 0.127: v16.78,5.73 16.78,4.47 17.06,4.08 25.01,4.08 25.49,4.39 PROC1.43 | v5.19,13.29 v5.19,18.79
  Bottom 0.127: v16.78,5.73 16.34,6.15 15.2,6.15 12.55,6.16 11.59,7.09 11.6,9.96 11.37,10.19 6.4,10.19 5.81,10.7 5.47,10.69 5.19,10.98 5.19,11.71 5.19,11.79 v5.19,13.29 | v5.19,18.79 5.19,19.29 5.29,19.39 5.74,19.39 U15.1
INT7  (via drill 0.25 pad 0.66)
  Top 0.127: v23.57,9.2 25.72,9.2 25.99,8.93 PROC1.44 | v12.47,18.09 12.47,18.41 12.9,18.84 U20.8
  Bottom 0.127: v12.47,18.09 12.81,18.54 20.46,18.54 20.46,16.95 20.82,16.95 22.62,14.85 22.62,14.38 23.42,13.82 23.5,13.83 23.66,13.7 23.66,10.93 23.57,10.65 v23.57,9.2
INT8  (via drill 0.25 pad 0.66)
  Top 0.127: v13.56,9.84 13.15,9.84 U16.24 | v21.31,10.8 26.16,10.77 26.43,10.5 26.43,7.43 PROC1.45
  Bottom 0.127: v21.31,10.8 20.33,12.01 18.73,12.03 17.59,11.09 16.59,10.32 16.59,8.87 16.22,8.5 16.22,7.43 15.95,7.05 15.12,7.15 14.82,7.16 14.59,7.39 14.59,7.41 14.53,8.2 13.63,8.51 v13.56,9.84
INT9  (via drill 0.25)
  Top 0.178: v127.6,18.67 127.6,17.07 U25.24 | v146.8,14.76 147.34,14.23 148.05,14.23 PROC2.45
  Bottom 0.178: v127.6,18.67 128.95,20.4 141.29,20.4 145.91,14.76 v146.8,14.76
MCLR  (via drill 0.25 pad 0.66)
  Top 0.127: JP3.5 52.2,22.89 52.02,22.71 v52.02,21.59 | PROC.7 70.67,16.45 71.36,15.76 71.36,15.26 71.05,14.96 v69.46,14.96
  Bottom 0.127: 69.44,14.98 69.03,14.98 67.69,16.33 67.69,16.62 64.85,19.46 53.94,19.46 52.02,21.38 v52.02,21.59 | 69.44,14.98 | 69.44,14.98 v69.46,14.96 | 69.44,14.98 69.49,14.93 69.72,14.7 70.24,14.7 R9.1
MCLR1  (via drill 0.25 pad 0.66)
  Top 0.127: v23.22,14.86 23.71,14.23 26.71,14.23 26.95,14.61 26.95,15.41 24.99,17.37 PROC1.7 | 6.52,23.32 JP6.5 6.52,23.02 5.69,22.49 5.69,20.24 6.09,19.73 8.99,19.73 9.19,19.49 9.79,19.49 10.13,19.15 v10.48,19.15
  Bottom 0.127: R11.1 23.71,14.88 23.69,14.87 23.23,14.88 v23.22,14.86 23.09,14.87 22.35,15.63 21.79,16.24 21.79,17.05 21.27,17.71 21.04,17.91 21.06,18 21.05,19.09 10.53,19.09 v10.48,19.15
MCLR2  (via drill 0.25)
  Top 0.178: 126.53,20.38 126.53,20.45 126.36,20.63 122.8,20.63 122.8,17.96 J1.1 | 126.53,20.38 126.53,19.38 125.82,18.67 R28.1 | PROC2.7 138.45,12.72 v139.26,13.58 | v133.96,19.53 133.76,19.53 133.31,19.98 126.93,19.98 126.53,20.38
  Bottom 0.178: v139.26,13.58 139.26,14.83 135.71,18.38 135.11,18.38 v133.96,19.53
N$1  (via drill 0.25 pad 0.66)
  Top 0.127: v76.93,13.56 76.66,13.28 76.66,13.14 PROC.56
  Bottom 0.127: C27.1 76.48,12.89 76.93,13.34 v76.93,13.56
N$2  (via drill 0.25 pad 0.66)
  Top 0.127: v7.47,12.62 7.48,12.15 7.88,11.98 7.74,12.04 8.72,11.61 9.84,11.15 U16.29
  Bottom 0.127: v7.47,12.62 7.56,12.61 8.06,12.37 C11.1
N$3  (via drill 0.25 pad 0.66)
  Top 0.127: v60.87,8.8 60.26,9.41 LED3.C
  Bottom 0.127: R12.1 60.07,9.07 60.61,9.07 v60.87,8.8
N$4  (via drill 0.25 pad 0.66)
  Top 0.127: U16.13 10.35,4.99 10.59,4.99 | 10.59,4.99 10.85,4.99 U16.14 | 10.59,4.99 10.59,4.73 10.59,4.58 12.58,4.58 15.09,4.59 v15.24,4.88
  Bottom 0.127: v15.24,4.88 14.47,4.89 12.57,4.89 10.62,6.84 10.38,6.83 C30.1
N$5  (via drill 0.25 pad 0.66)
  Top 0.127: v8.49,19.18 8.9,19.18 9.19,18.89 9.49,18.89 9.67,18.69 U18.20
  Bottom 0.127: v8.49,19.18 8.49,19.1 8.65,18.93 8.96,18.93 C31.2
N$6
  Top 0.127: LED3.A 62.35,10.02 62.35,10.32 63.18,11.14 PROC.29
N$7  (via drill 0.25 pad 0.66)
  Top 0.127: LED2.C 59.93,11.18 59.93,11.11 v59.19,10.37
  Bottom 0.127: R14.1 59.46,10.94 59.46,10.64 v59.19,10.37
N$8  (via drill 0.25 pad 0.66)
  Top 0.127: v60.17,13.17 60.48,12.87 60.51,12.87 LED1.C
  Bottom 0.127: R15.1 59.99,12.98 v60.17,13.17
N$9
  Top 0.127: PROC.28 63.18,11.64 63.18,11.56 62.61,11.18 LED2.A
N$10  (via drill 0.25 pad 0.66)
  Top 0.127: v9.31,13.25 9.17,13.26 U18.10
  Bottom 0.127: v9.31,13.25 9.1,13.34 C33.1
N$11
  Top 0.127: PROC.27 63.18,12.14 62.6,12.14 62.6,12.28 LED1.A
N$12  (via drill 0.25 pad 0.66)
  Top 0.127: v26.41,14.81 24.75,14.88 24.49,15.15 PROC1.8
  Bottom 0.127: v26.41,14.81 29.46,14.81 29.79,15.09 U7.4
N$13  (via drill 0.25 pad 0.66)
  Top 0.254: v4.12,8.4 3.56,7.94 BALUN1.4
  Bottom 0.254: v4.12,8.4 4.43,8.41 4.73,8.16 C40.1
N$14  (via drill 0.25 pad 0.66)
  Top 0.254: v4.57,6.17 4.36,6.12 BALUN1.3
  Bottom 0.254: v4.57,6.17 4.68,6.17 5.04,5.73 C41.1
N$15  (via drill 0.25 pad 0.66)
  Top 0.254: v6.59,8.55 6.96,8.39 U16.4
  Bottom 0.254: v6.59,8.55 6.31,8.53 6.07,8.13 C40.2
N$16  (via drill 0.25 pad 0.66)
  Top 0.254: v6.74,6.57 6.74,7.56 7.14,7.84 U16.5
  Bottom 0.254: v6.74,6.57 6.73,5.47 C41.2
N$17
  Top 0.254: U21.P$1 2.26,5.7 BALUN1.1 2.06,6.12 1.69,6.49 1.69,8.79 U22.SIG
N$18  (via drill 0.25 pad 0.66)
  Top 0.127: 12.47,13.51 12.47,11.27 12.18,10.99 U16.25 | 12.47,13.51 13.17,13.04 U13.3 | 12.47,13.51 v11.65,14.08
  Bottom 0.127: v11.65,14.08 11.67,13.86 11.67,13.46 C43.1
N$19  (via drill 0.25 pad 0.66)
  Top 0.127: U16.26 11.35,11.4 11.45,11.6 11.29,11.67 v10.7,12.3 11.35,11.62 U13.1
  Bottom 0.127: v10.7,12.3 11.23,11.7 C42.1
N$20  (via drill 0.25 pad 0.66)
  Top 0.127: v34.32,4.88 34.32,4.35 34.06,4.09 | 34.06,4.09 | 34.06,4.09 28.25,4.09 27.98,4.35 JP7.1
  Bottom 0.127: C44.1 27.15,4.61 28.87,4.61 | v34.32,4.88 34.05,4.61 28.87,4.61 | 28.87,4.61 R13.1
N$21
  Top 0.127: JP3.1 56.62,23.49 56.62,23.4 56.97,23.05 56.97,22.83 57.23,22.58 57.23,22.17 57.23,22.16 57.23,21.8 57.97,21.06 61.11,21.06 63.21,18.96 63.21,18.39 63.27,18.33 63.27,17.13 PROC.17
N$22  (via drill 0.25 pad 0.66)
  Top 0.127: v30.85,19.04 31.51,18.74 31.51,17.84 31.36,17.7 25.75,17.7 25.49,17.97 PROC1.6